# Altium PCB ZMBo 1.1.PcbDoc (part 1 of 4)
Units mil, origin at the board's own origin, x right, y up, seen from the top; angles counter-clockwise.
Board outline 6000 x 4000 mil, 4 copper layers (Top Layer, Groun Plane, Power Plane, Bottom Layer); 280 components, 251 nets, 1047 pads, 1788 vias.
Unrouted connection lines stored in the file: 231.
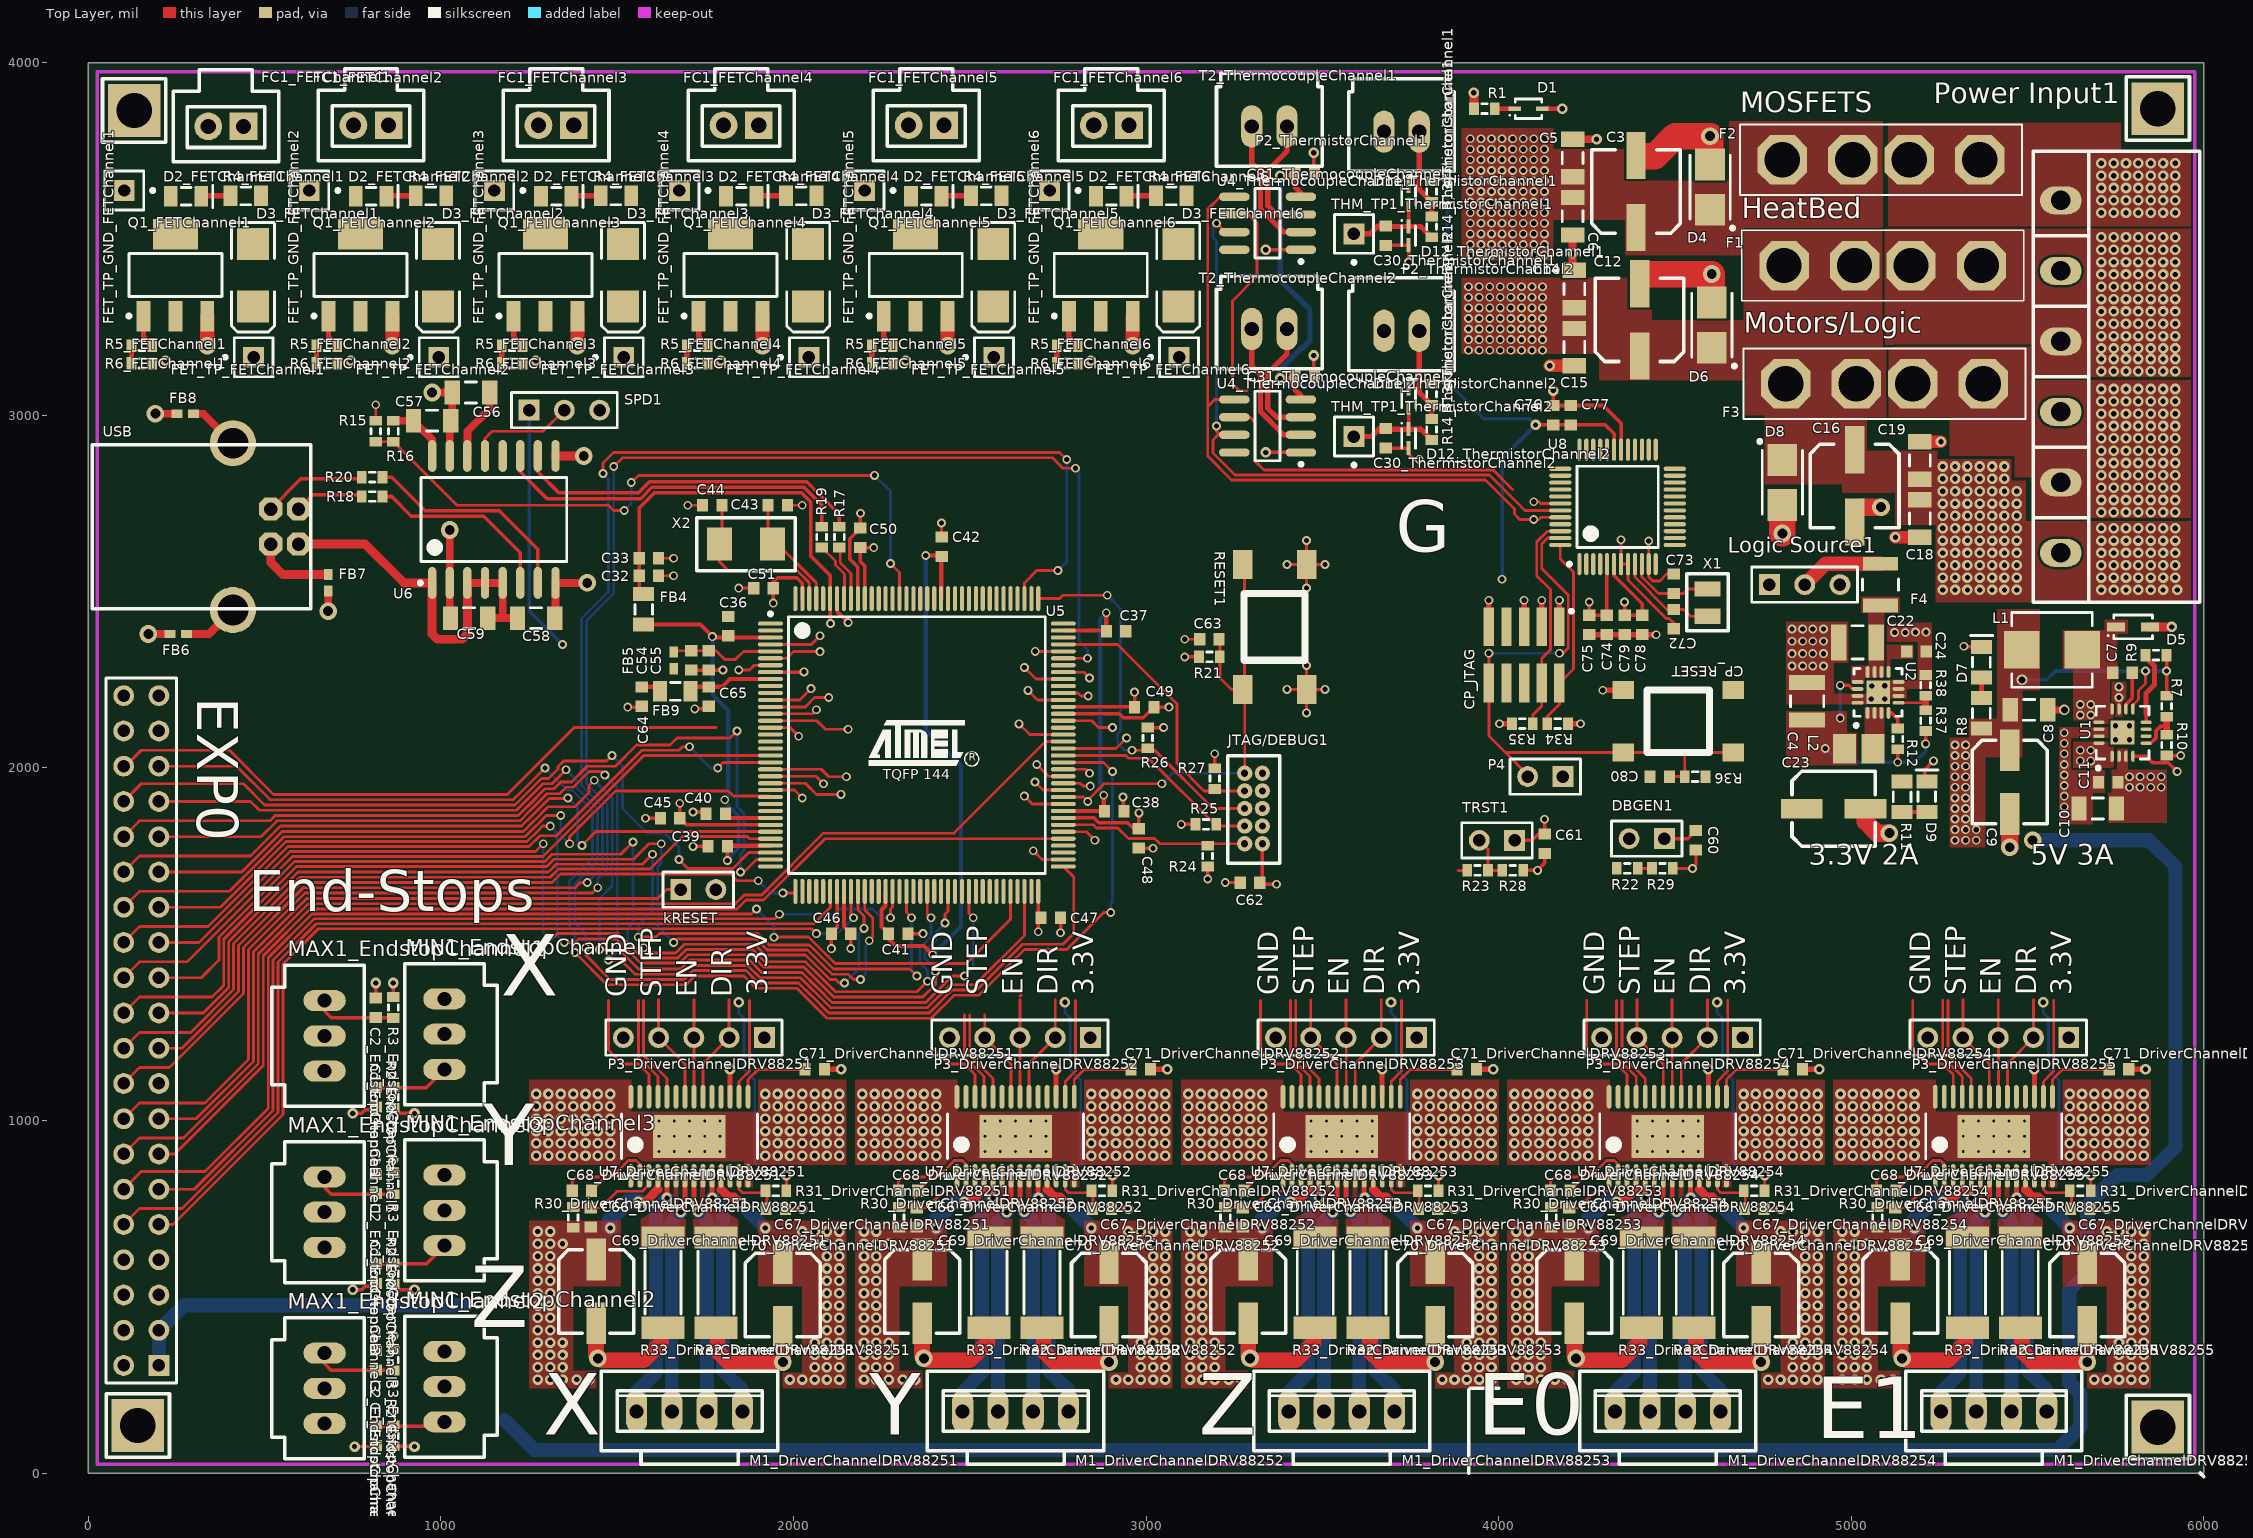
[diagram p0: Top Layer view]
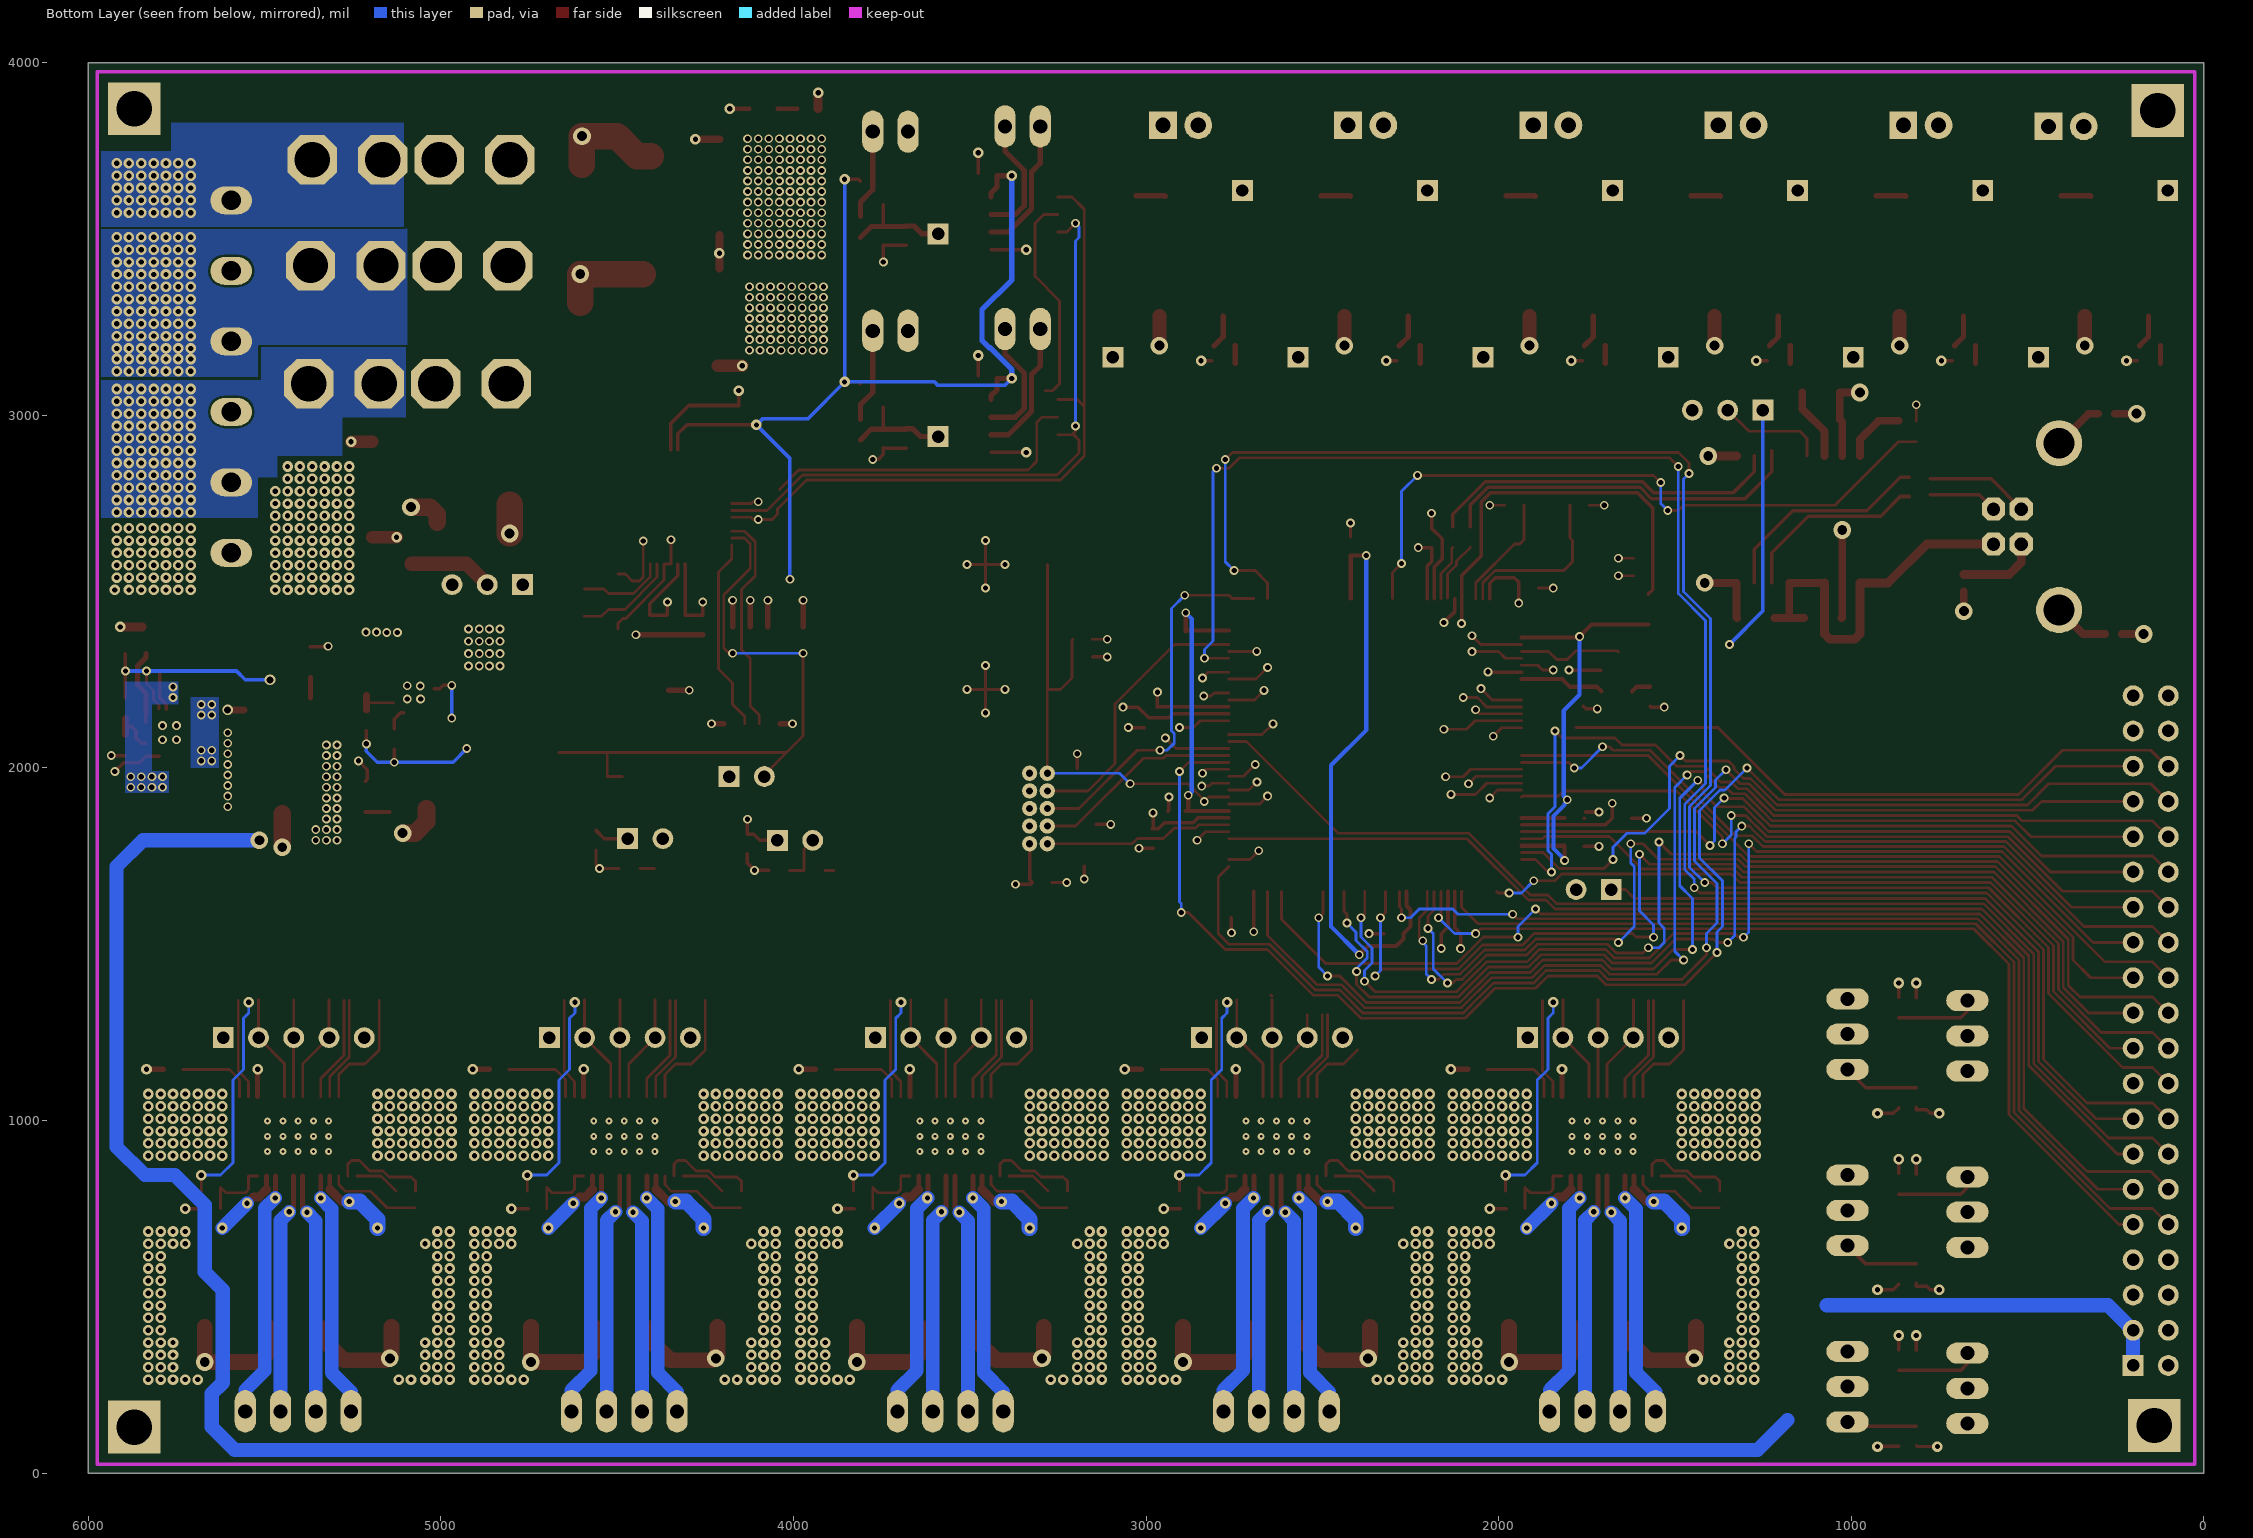
[diagram p1: Bottom Layer view, seen from below]
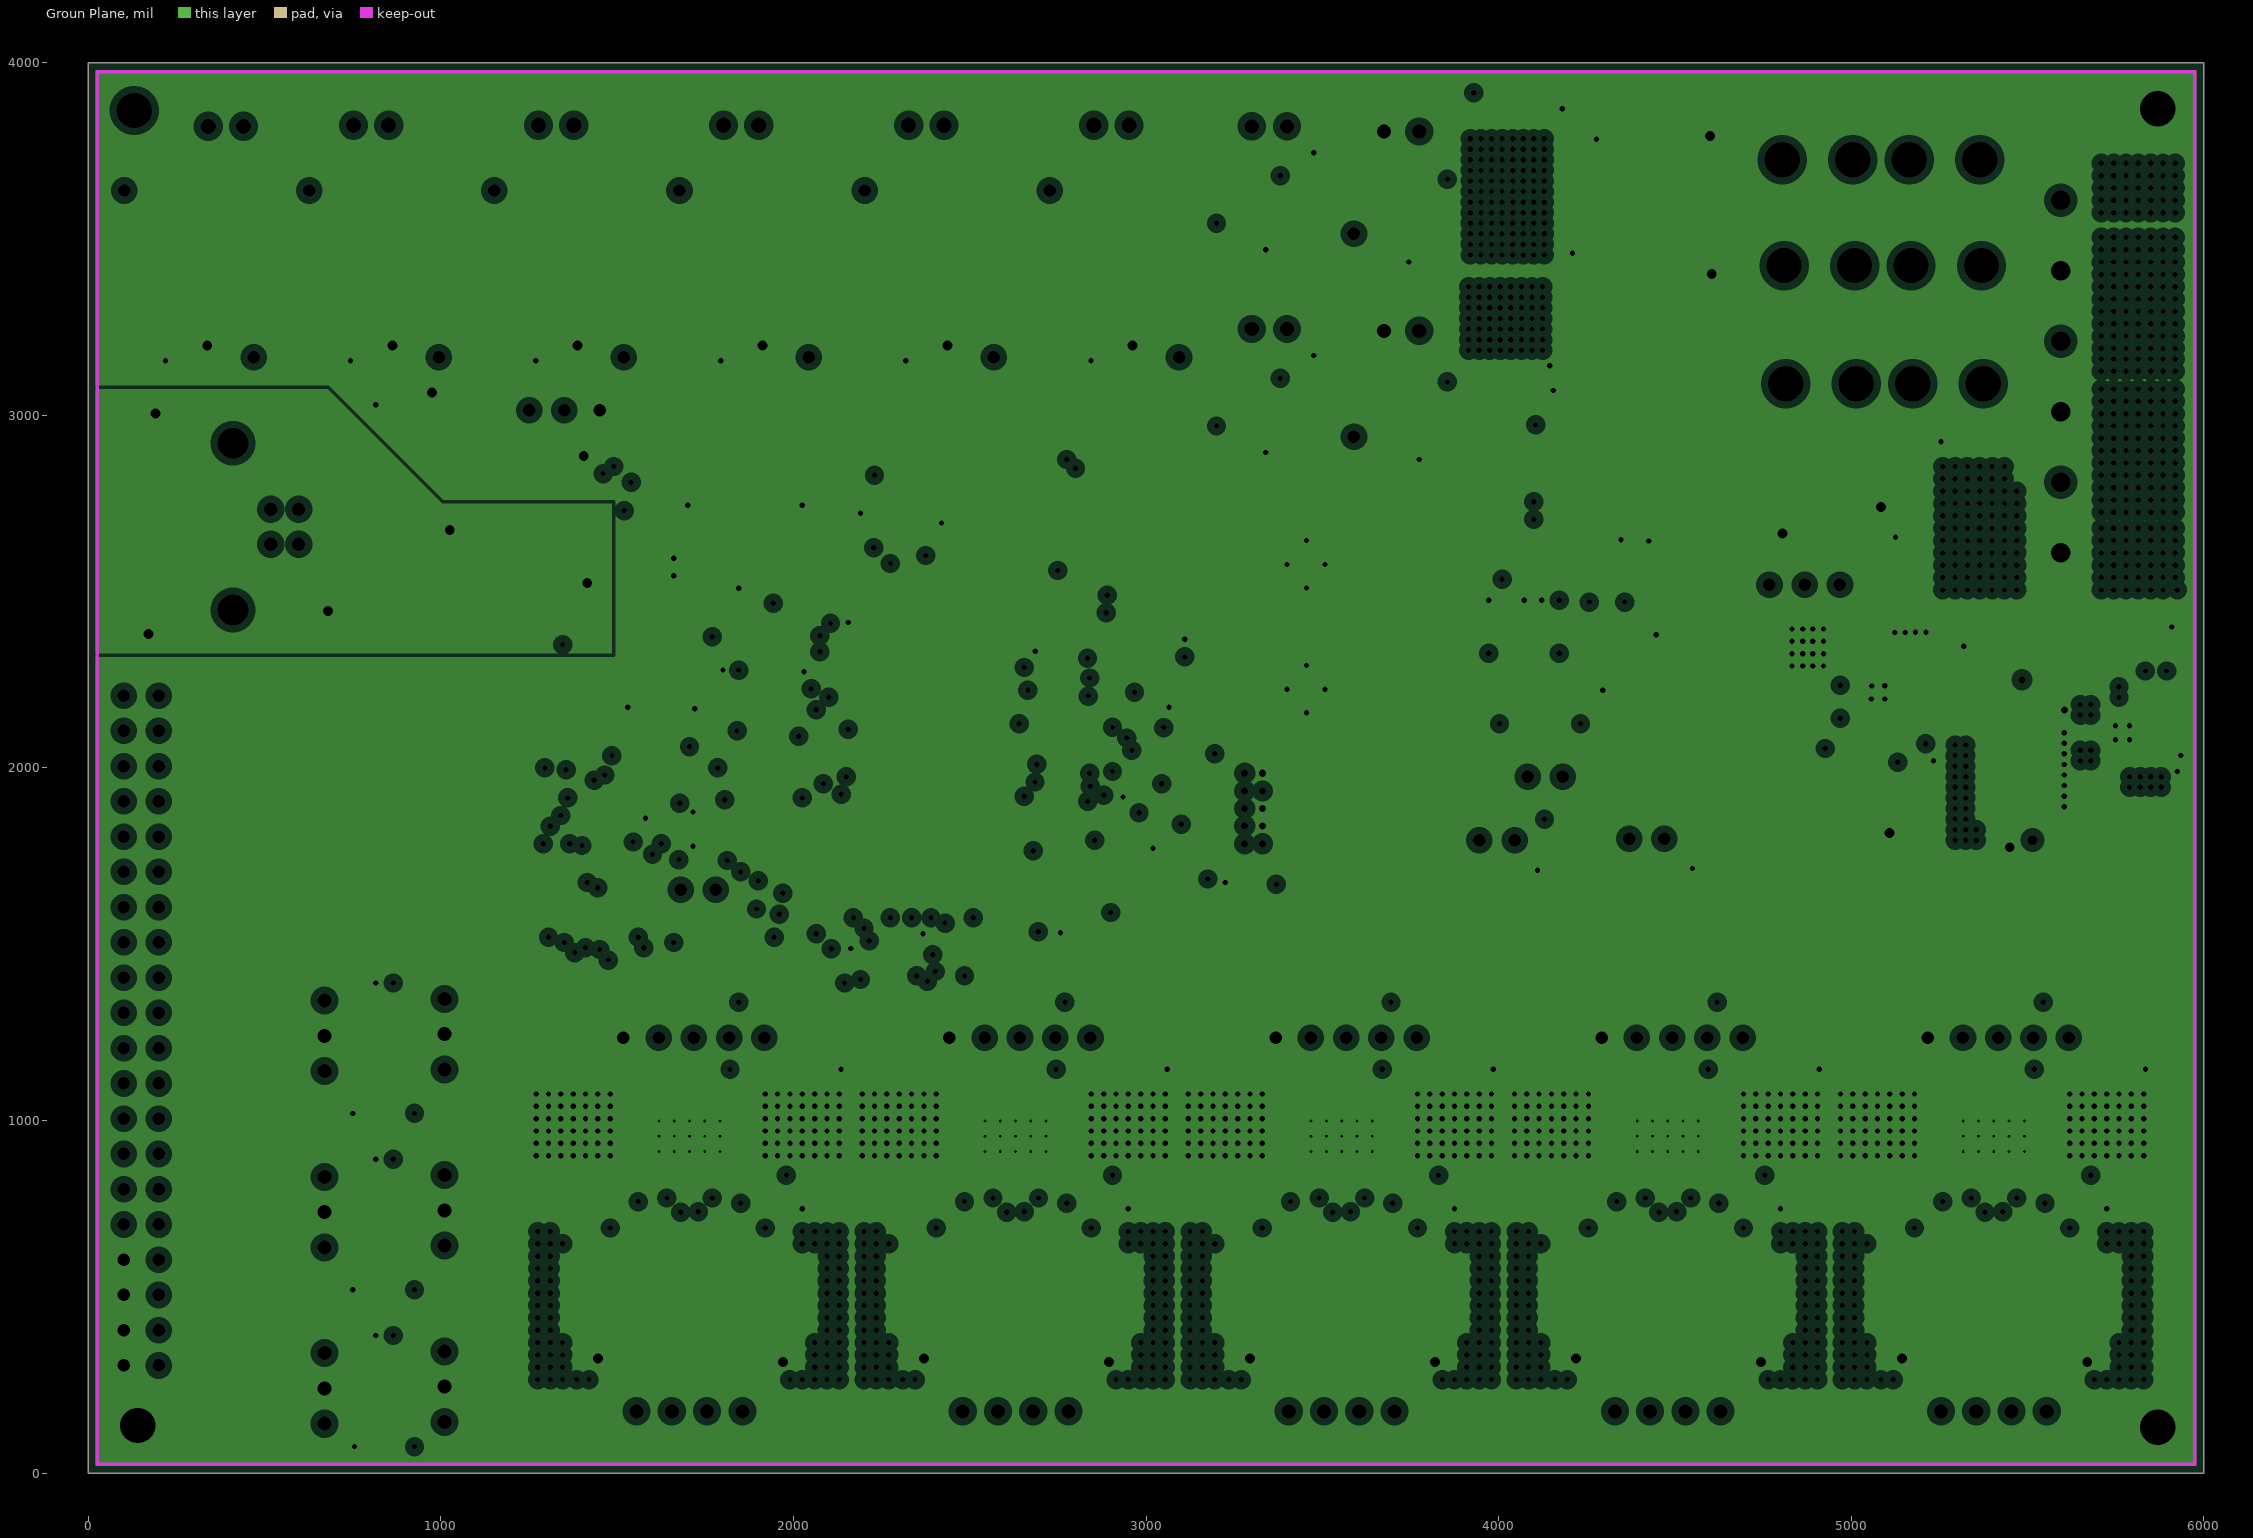
[diagram p2: Groun Plane, clearances drawn from the general rule]
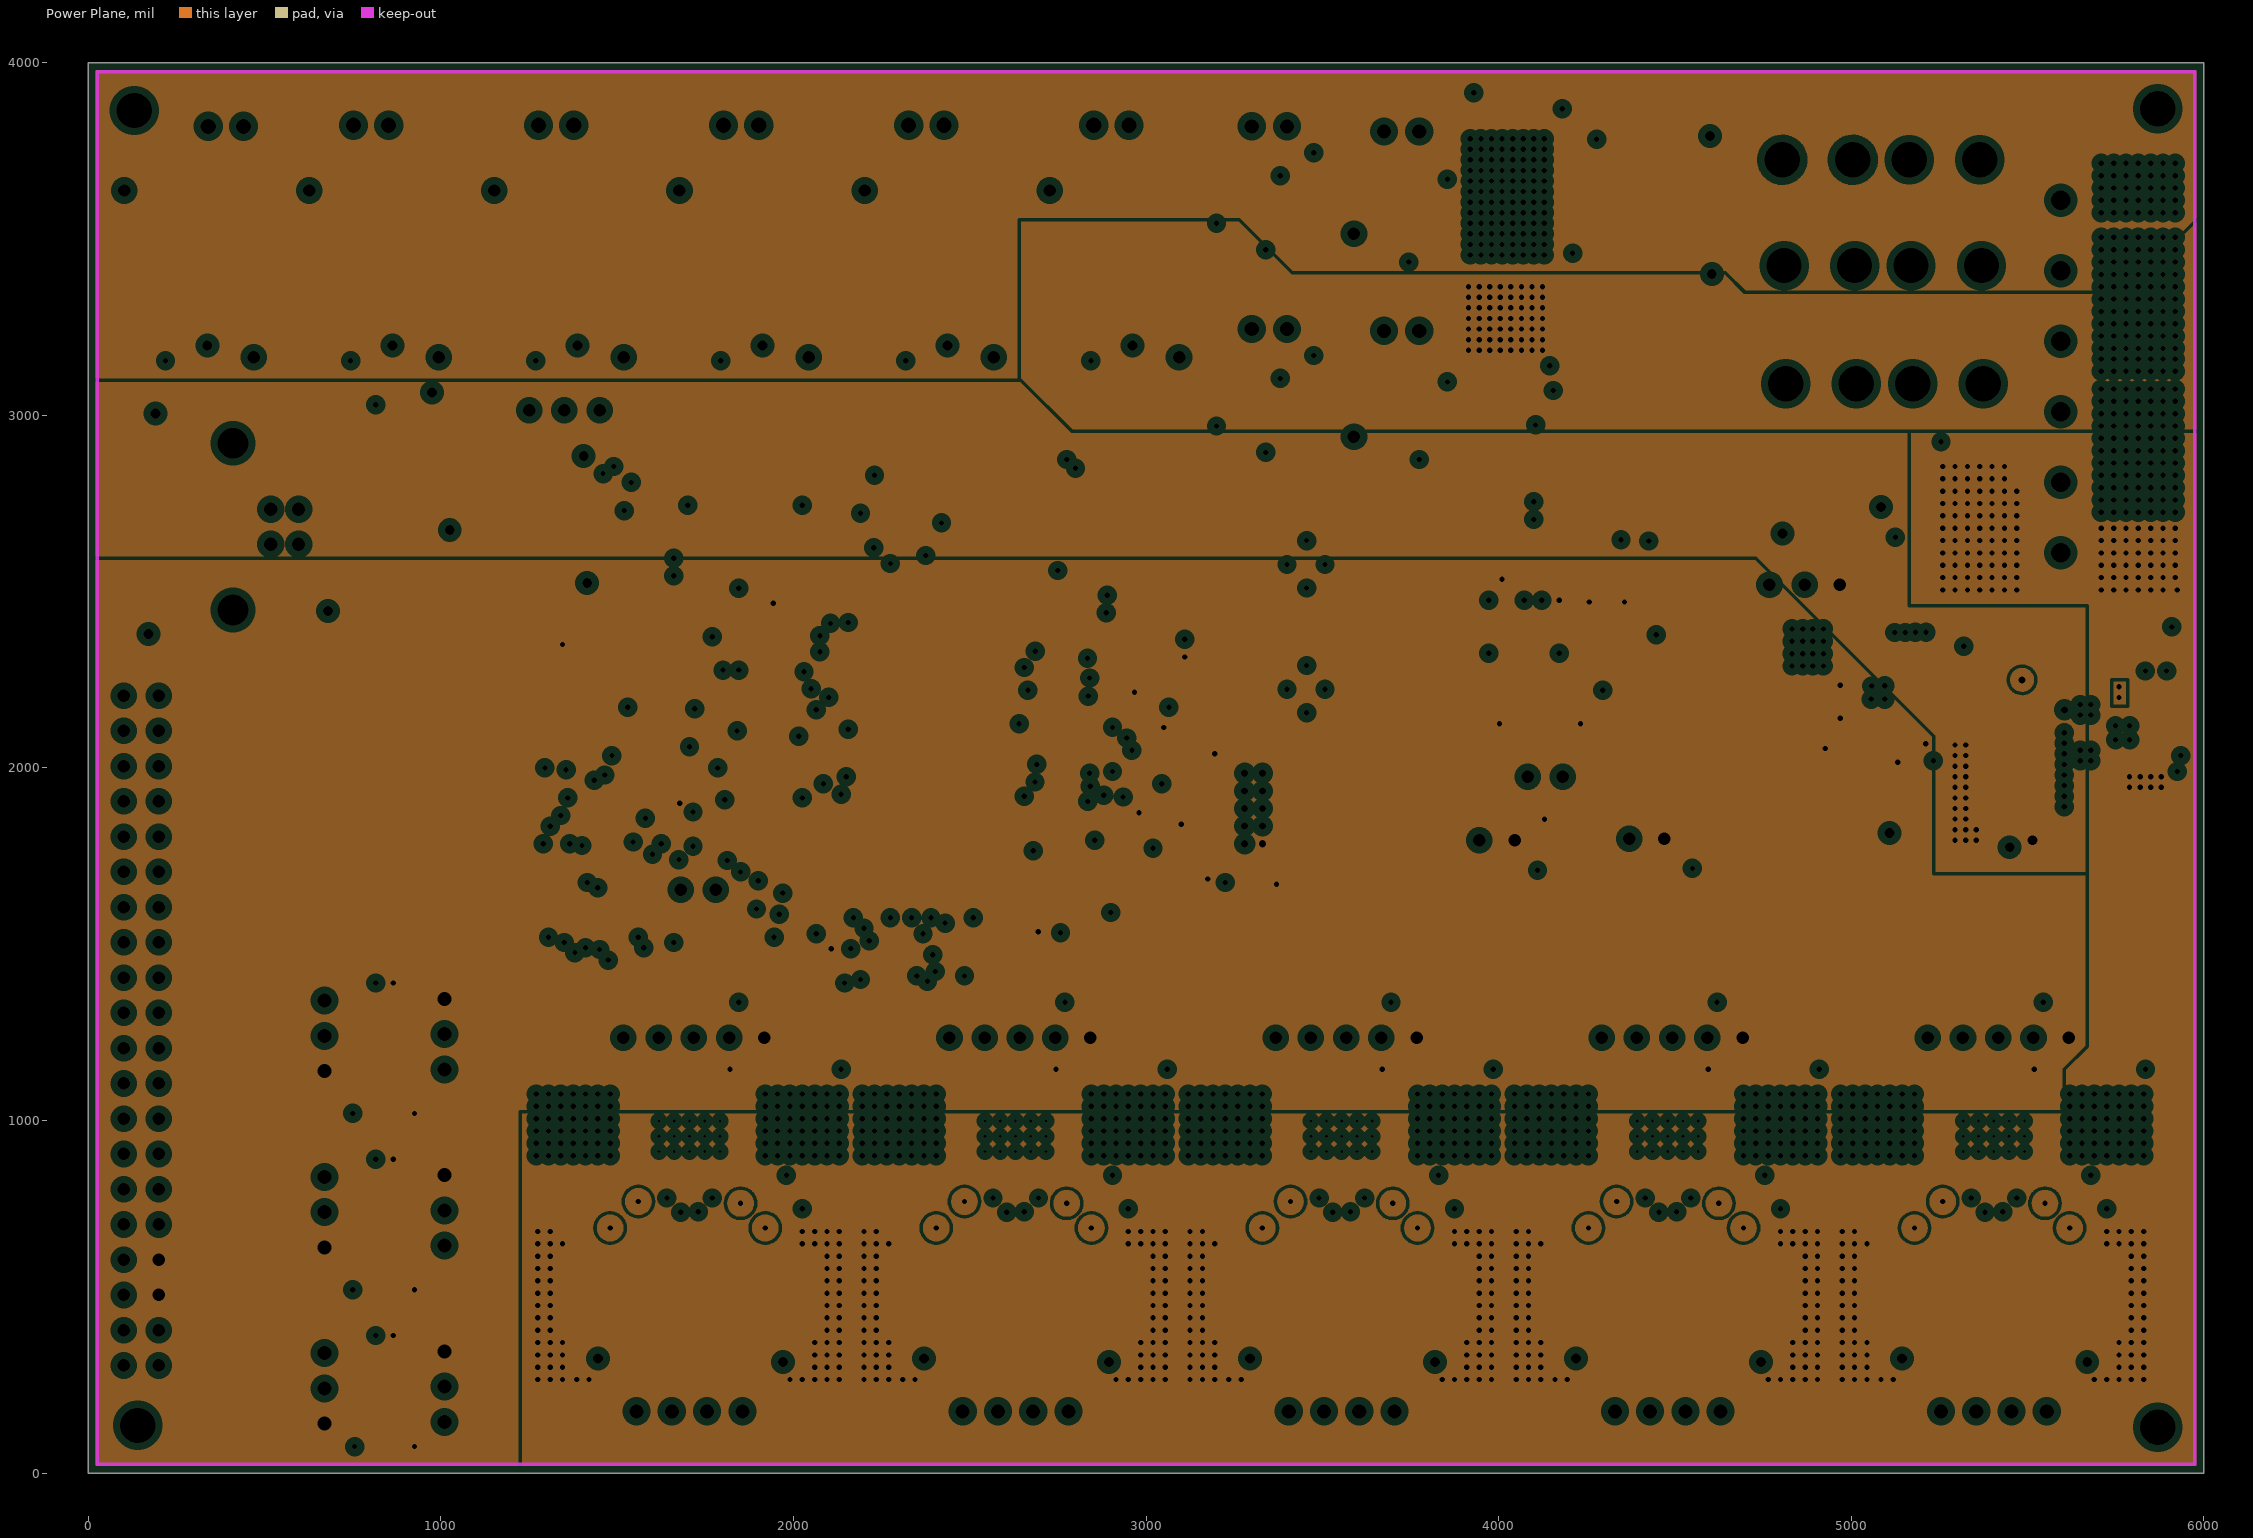
[diagram p3: Power Plane, clearances drawn from the general rule]

## Layer stack, top to bottom
Top Layer: signal copper 1.4
Dielectric: core 12.6, FR-4, Dk 4.8
Groun Plane: plane copper 1.4, net (Multiple Nets)
Dielectric: prepreg 12.6, FR-4, Dk 4.8
Power Plane: plane copper 1.4, net (Multiple Nets)
Dielectric: core 12.6, FR-4, Dk 4.8
Bottom Layer: signal copper 1.4

## Board outline
0,0 6000,0 6000,4000 0,4000

## Design rules (kind name [scope] priority, off if disabled: settings)
Clearance [All] p1: gap=6
ComponentClearance [All] p1: gap=0 collisioncheckmode=3 verticalgap=10 showdistances=FALSE
FanoutControl Fanout_SOIC [(InComponent('U8') AND InComponent('U7'))] p3: bgadir=Out bgaviamode=Centered fanoutstyle=Staggered fanoutdirection=Alternating viagrid=1 // Fanout_SOIC (Default Rule)
FanoutControl Fanout_Small [All] p4: bgadir=Out bgaviamode=Centered fanoutstyle=Auto fanoutdirection=Alternating viagrid=1 // Fanout_Small (Default Rule)
HoleSize [All] p1: absolutevalues=TRUE maxlimit=120 minlimit=1 maxpercent=80.000 minpercent=20.000
MinimumSolderMaskSliver [All] p1 off: minsoldermaskwidth=10
PlaneClearance [All] p1: clearance=20
PlaneConnect [All] p1: planeconnectstyle=Direct reliefexpansion=20 reliefentries=4 reliefconductorwidth=10 reliefairgap=10
PolygonConnect [All] p1: connectstyle=Direct reliefconductorwidth=45 reliefentries=4 polygonreliefangle="90 Angle" airgapwidth=10
RoomDefinition "U_Offboard Kinen Expansion" [InComponentClass('U_Offboard Kinen Expansion')] p1: confinementstyle=ConfineIn formatcopy=TRUE lockcomponents=FALSE outline 0,0 475,0 475,2550 0,2550
RoomDefinition U_CoProcessor [InComponentClass('U_CoProcessor')] p2: confinementstyle=ConfineIn formatcopy=TRUE lockcomponents=FALSE outline 4725,1900 4725,3100 3900,3100 3900,1900
RoomDefinition ThermocoupleChannel2 [InComponentClass('ThermocoupleChannel2')] p3: confinementstyle=ConfineIn formatcopy=TRUE lockcomponents=FALSE outline 3525,2850 3525,3425 3175,3425 3175,2850
RoomDefinition ThermocoupleChannel1 [InComponentClass('ThermocoupleChannel1')] p4: confinementstyle=ConfineIn formatcopy=TRUE lockcomponents=FALSE outline 3525,3425 3525,4000 3175,4000 3175,3425
RoomDefinition ThermistorChannel2 [InComponentClass('ThermistorChannel2')] p5: confinementstyle=ConfineIn formatcopy=TRUE lockcomponents=FALSE outline 3525,2825 3900,2825 3900,3400 3525,3400
RoomDefinition ThermistorChannel1 [InComponentClass('ThermistorChannel1')] p6: confinementstyle=ConfineIn formatcopy=TRUE lockcomponents=FALSE outline 3525,3400 3900,3400 3900,3975 3525,3975
RoomDefinition FETChannel6 [InComponentClass('FETChannel6')] p7: confinementstyle=ConfineIn formatcopy=TRUE lockcomponents=TRUE outline 2650,3100 3175,3100 3175,3998 2650,3998
RoomDefinition FETChannel5 [InComponentClass('FETChannel5')] p8: confinementstyle=ConfineIn formatcopy=TRUE lockcomponents=TRUE outline 2125,3100 2650,3100 2650,3998 2125,3998
RoomDefinition FETChannel4 [InComponentClass('FETChannel4')] p9: confinementstyle=ConfineIn formatcopy=TRUE lockcomponents=TRUE outline 1600,3100 2125,3100 2125,3998 1600,3998
RoomDefinition FETChannel3 [InComponentClass('FETChannel3')] p10: confinementstyle=ConfineIn formatcopy=TRUE lockcomponents=TRUE outline 1075,3100 1600,3100 1600,3998 1075,3998
RoomDefinition FETChannel2 [InComponentClass('FETChannel2')] p11: confinementstyle=ConfineIn formatcopy=TRUE lockcomponents=TRUE outline 550,3100 1075,3100 1075,3998 550,3998
RoomDefinition FETChannel1 [InComponentClass('FETChannel1')] p12: confinementstyle=ConfineIn formatcopy=TRUE lockcomponents=FALSE outline 25,3100 550,3100 550,3998 25,3998
RoomDefinition EndstopChannel3 [InComponentClass('EndstopChannel3')] p13: confinementstyle=ConfineIn formatcopy=TRUE lockcomponents=TRUE outline 475,500 1200,500 1200,1000 475,1000
RoomDefinition EndstopChannel2 [InComponentClass('EndstopChannel2')] p14: confinementstyle=ConfineIn formatcopy=TRUE lockcomponents=FALSE outline 475,0 1200,0 1200,500 475,500
RoomDefinition EndstopChannel1 [InComponentClass('EndstopChannel1')] p15: confinementstyle=ConfineIn formatcopy=TRUE lockcomponents=FALSE outline 475,1000 1200,1000 1200,1500 475,1500
RoomDefinition DriverChannelDRV88255 [InComponentClass('DriverChannelDRV88255')] p16: confinementstyle=ConfineIn formatcopy=TRUE lockcomponents=TRUE outline 4950,0 5875,0 5875,1350 4950,1350
RoomDefinition DriverChannelDRV88254 [InComponentClass('DriverChannelDRV88254')] p17: confinementstyle=ConfineIn formatcopy=TRUE lockcomponents=TRUE outline 4025,0 4950,0 4950,1350 4025,1350
RoomDefinition DriverChannelDRV88253 [InComponentClass('DriverChannelDRV88253')] p18: confinementstyle=ConfineIn formatcopy=TRUE lockcomponents=TRUE outline 3100,0 4025,0 4025,1350 3100,1350
RoomDefinition DriverChannelDRV88252 [InComponentClass('DriverChannelDRV88252')] p19: confinementstyle=ConfineIn formatcopy=TRUE lockcomponents=TRUE outline 2175,0 3100,0 3100,1350 2175,1350
RoomDefinition DriverChannelDRV88251 [InComponentClass('DriverChannelDRV88251')] p20: confinementstyle=ConfineIn formatcopy=TRUE lockcomponents=FALSE outline 1250,0 2175,0 2175,1350 1250,1350
RoutingVias [All] p1: holewidth=15 width=25 viastyle="Through Hole" minholewidth=15 minwidth=25 maxholewidth=28 maxwidth=50
SilkToSilkClearance [All] p1 off: silktosilkclearance=10
SilkToSolderMaskClearance SilkscreenOverComponentPads [IsPad] p1 off: minsilkscreentomaskgap=10 clearancetoexposedcopper=TRUE
SolderMaskExpansion [All] p1: expansion=4
Width [All] p1: maxlimit=200 minlimit=6 preferedwidth=6 minimp=50.000000 maximp=50.000000 favimp=50.000000
19 further rules are at their usual default settings.

## Classes and differential pairs
component class FETChannel6: D2_FETChannel6 D3_FETChannel6 FC1_FETChannel6 FET_TP_FETChannel6 FET_TP_GND_FETChannel6 Q1_FETChannel6 R4_FETChannel6 R5_FETChannel6 R6_FETChannel6
net class MISO[1..2]: MISO0 MISO1 MISO2
net class SCLK[1..2]: SCLK0 SCLK1 SCLK2
net class VCC_SOURCE[1..6]: VCC_SOURCE1 VCC_SOURCE2 VCC_SOURCE3 VCC_SOURCE4 VCC_SOURCE5 VCC_SOURCE6
net class THERM_AN[1..2]: THERM_AN0 THERM_AN1 THERM_AN2
net class TC_CS[1..2]: TC_CS0 TC_CS1 TC_CS2
net class STEP[1..5]: STEP1 STEP2 STEP3 STEP4 STEP5
net class REF[1..5]: REF1 REF2 REF3 REF4 REF5
net class MOD2E[1..5]: MOD2E1 MOD2E2 MOD2E3 MOD2E4 MOD2E5
net class MOD1E[1..5]: MOD1E1 MOD1E2 MOD1E3 MOD1E4 MOD1E5
net class MOD0E[1..5]: MOD0E1 MOD0E2 MOD0E3 MOD0E4 MOD0E5
net class MIN_ES[1..3]: MIN_ES0 MIN_ES1 MIN_ES2 MIN_ES3
net class MAX_ES[1..3]: MAX_ES0 MAX_ES1 MAX_ES2 MAX_ES3
net class FET_PWM[1..6]: FET_PWM1 FET_PWM2 FET_PWM3 FET_PWM5
net class EN[1..5]: EN1 EN2 EN3 EN4 EN5
net class DRV_RESET[1..5]: DRV_RESET1 DRV_RESET2 DRV_RESET3 DRV_RESET4 DRV_RESET5
net class DIR[1..5]: DIR1 DIR2 DIR3 DIR4 DIR5
component class "U_Offboard Kinen Expansion": EXP0
component class U_CoProcessor: C72 C73 C74 C75 C76 C77 C78 C79 C80 CP_JTAG CP_RESET P4 R34 R35 R36 U8 X1
component class Designator: C3 C4 C5 C6 C7 C8 C9 C10 C11 C12 C14 C15 C16 C18 C19 C22 C23 C24 D4 D5 D6 D7 D8 D9 F1 F2 F3 F4 L1 L2 "Logic Source1" "Power Input1" R7 R8 R9 R10 R11 R12 R37 R38 U1 U2
component class "ATSAM4E16EA_AU Main Controller": C32 C33 C36 C37 C38 C39 C40 C41 C42 C43 C44 C45 C46 C47 C48 C49 C50 C51 C54 C55 C56 C57 C58 C59 C60 C61 C62 C63 C64 C65 D1 DBGEN1 FB4 FB5 FB6 FB7 FB8 FB9 JTAG/DEBUG1 kRESET R1 R15 R16 R17 R18 R19 R20 R21 R22 R23 R24 R25 R26 R27 R28 R29 RESET1 SPD1 TRST1 U5 U6 USB X2
component class DriverChannelDRV88251: C66_DriverChannelDRV88251 C67_DriverChannelDRV88251 C68_DriverChannelDRV88251 C69_DriverChannelDRV88251 C70_DriverChannelDRV88251 C71_DriverChannelDRV88251 M1_DriverChannelDRV88251 P3_DriverChannelDRV88251 R30_DriverChannelDRV88251 R31_DriverChannelDRV88251 R32_DriverChannelDRV88251 R33_DriverChannelDRV88251 U7_DriverChannelDRV88251
component class DriverChannelDRV88252: C66_DriverChannelDRV88252 C67_DriverChannelDRV88252 C68_DriverChannelDRV88252 C69_DriverChannelDRV88252 C70_DriverChannelDRV88252 C71_DriverChannelDRV88252 M1_DriverChannelDRV88252 P3_DriverChannelDRV88252 R30_DriverChannelDRV88252 R31_DriverChannelDRV88252 R32_DriverChannelDRV88252 R33_DriverChannelDRV88252 U7_DriverChannelDRV88252
component class DriverChannelDRV88253: C66_DriverChannelDRV88253 C67_DriverChannelDRV88253 C68_DriverChannelDRV88253 C69_DriverChannelDRV88253 C70_DriverChannelDRV88253 C71_DriverChannelDRV88253 M1_DriverChannelDRV88253 P3_DriverChannelDRV88253 R30_DriverChannelDRV88253 R31_DriverChannelDRV88253 R32_DriverChannelDRV88253 R33_DriverChannelDRV88253 U7_DriverChannelDRV88253
component class DriverChannelDRV88254: C66_DriverChannelDRV88254 C67_DriverChannelDRV88254 C68_DriverChannelDRV88254 C69_DriverChannelDRV88254 C70_DriverChannelDRV88254 C71_DriverChannelDRV88254 M1_DriverChannelDRV88254 P3_DriverChannelDRV88254 R30_DriverChannelDRV88254 R31_DriverChannelDRV88254 R32_DriverChannelDRV88254 R33_DriverChannelDRV88254 U7_DriverChannelDRV88254
component class DriverChannelDRV88255: C66_DriverChannelDRV88255 C67_DriverChannelDRV88255 C68_DriverChannelDRV88255 C69_DriverChannelDRV88255 C70_DriverChannelDRV88255 C71_DriverChannelDRV88255 M1_DriverChannelDRV88255 P3_DriverChannelDRV88255 R30_DriverChannelDRV88255 R31_DriverChannelDRV88255 R32_DriverChannelDRV88255 R33_DriverChannelDRV88255 U7_DriverChannelDRV88255
component class EndstopChannel1: C1_EndstopChannel1 C2_EndstopChannel1 MAX1_EndstopChannel1 MIN1_EndstopChannel1 R2_EndstopChannel1 R3_EndstopChannel1
component class EndstopChannel2: C1_EndstopChannel2 C2_EndstopChannel2 MAX1_EndstopChannel2 MIN1_EndstopChannel2 R2_EndstopChannel2 R3_EndstopChannel2
component class EndstopChannel3: C1_EndstopChannel3 C2_EndstopChannel3 MAX1_EndstopChannel3 MIN1_EndstopChannel3 R2_EndstopChannel3 R3_EndstopChannel3
component class FETChannel1: D2_FETChannel1 D3_FETChannel1 FC1_FETChannel1 FET_TP_FETChannel1 FET_TP_GND_FETChannel1 Q1_FETChannel1 R4_FETChannel1 R5_FETChannel1 R6_FETChannel1
component class FETChannel2: D2_FETChannel2 D3_FETChannel2 FC1_FETChannel2 FET_TP_FETChannel2 FET_TP_GND_FETChannel2 Q1_FETChannel2 R4_FETChannel2 R5_FETChannel2 R6_FETChannel2
component class FETChannel3: D2_FETChannel3 D3_FETChannel3 FC1_FETChannel3 FET_TP_FETChannel3 FET_TP_GND_FETChannel3 Q1_FETChannel3 R4_FETChannel3 R5_FETChannel3 R6_FETChannel3
component class FETChannel4: D2_FETChannel4 D3_FETChannel4 FC1_FETChannel4 FET_TP_FETChannel4 FET_TP_GND_FETChannel4 Q1_FETChannel4 R4_FETChannel4 R5_FETChannel4 R6_FETChannel4
component class FETChannel5: D2_FETChannel5 D3_FETChannel5 FC1_FETChannel5 FET_TP_FETChannel5 FET_TP_GND_FETChannel5 Q1_FETChannel5 R4_FETChannel5 R5_FETChannel5 R6_FETChannel5
component class ThermistorChannel1: C30_ThermistorChannel1 D11_ThermistorChannel1 D12_ThermistorChannel1 P2_ThermistorChannel1 R13_ThermistorChannel1 R14_ThermistorChannel1 THM_TP1_ThermistorChannel1
component class ThermistorChannel2: C30_ThermistorChannel2 D11_ThermistorChannel2 D12_ThermistorChannel2 P2_ThermistorChannel2 R13_ThermistorChannel2 R14_ThermistorChannel2 THM_TP1_ThermistorChannel2
component class ThermocoupleChannel1: C31_ThermocoupleChannel1 T2_ThermocoupleChannel1 U4_ThermocoupleChannel1
component class ThermocoupleChannel2: C31_ThermocoupleChannel2 T2_ThermocoupleChannel2 U4_ThermocoupleChannel2
net class OVREF[1..2]: OVREF1 OVREF2
channel class "Driver Channel DRV8825": DriverChannelDRV88251 DriverChannelDRV88252 DriverChannelDRV88253 DriverChannelDRV88254 DriverChannelDRV88255
channel class "Endstop Channel": EndstopChannel1 EndstopChannel2 EndstopChannel3
channel class "FET Channel": FETChannel1 FETChannel2 FETChannel3 FETChannel4 FETChannel5 FETChannel6
channel class "Thermistor Channel": ThermistorChannel1 ThermistorChannel2
channel class "Thermocouple Channel": ThermocoupleChannel1 ThermocoupleChannel2

## Components (designator, comment, footprint, x,y, rotation, side; value= is the part's Value field where it differs from the comment)
C1_EndstopChannel1 "0603" 1608[0603] 815,1065.47 r270 top (schematic designator C1)
C1_EndstopChannel2 "0603" 1608[0603] 815,105.47 r270 top (schematic designator C1)
C1_EndstopChannel3 "0603" 1608[0603] 815,565.47 r270 top (schematic designator C1)
C2_EndstopChannel1 "0603" 1608[0603] 815,1320 r90 top (schematic designator C2)
C2_EndstopChannel2 "0603" 1608[0603] 815,320 r90 top (schematic designator C2)
C2_EndstopChannel3 "0603" 1608[0603] 815,820 r90 top (schematic designator C2)
C3 "VAS D" "Panasonic VS D" 4390,3635 r270 top
C4 "1210" C1210 4875.58,2189.31 r90 top
C5 "1206" C1206 4210,3730 r270 top
C6 "1206" C1206 4210,3565 r90 top
C7 "Cap Semi" 1608[0603] 5770,2270 r0 top
C8 "Cap Semi" C1206 5505,2165 r180 top
C9 "VS C" "Panasonic VS C" 5565,1840 r90 top
C10 "Cap Semi" C1206 5700,1885 r0 top
C11 "Cap Semi" 1608[0603] 5730,1960 r0 top
C12 "VAS D" "Panasonic VS D" 4400,3271.02 r270 top
C14 "1206" C1206 4215,3358.66 r270 top
C15 "1206" C1206 4215,3193.66 r90 top
C16 "VAS D" "Panasonic VS D" 5010,2800 r90 top
C18 "1206" C1206 5195,2707.36 r90 top
C19 "1206" C1206 5195,2872.36 r270 top
C22 "1210" C1210 5018.58,2356.31 r180 top
C23 "VS C" "Panasonic VS C" 5070.58,1999.31 r180 top
C24 "0603" 1608[0603] 5185.58,2330.31 r180 top
C30_ThermistorChannel1 "Cap Semi" 1608[0603] 3680,3510 r90 top (schematic designator C30)
C30_ThermistorChannel2 "Cap Semi" 1608[0603] 3680,2935 r90 top (schematic designator C30)
C31_ThermocoupleChannel1 "Cap Semi" 1608[0603] 3450.51,3685 r180 top (schematic designator C31)
C31_ThermocoupleChannel2 "Cap Semi" 1608[0603] 3450.51,3110 r180 top (schematic designator C31)
C32 "0603" 1608[0603] 1590,2545 r180 top
C33 "0603" 1608[0603] 1590,2595 r180 top
C36 "0603" 1608[0603] 1815,2402.56 r270 top
C37 "0603" 1608[0603] 2915,2387.56 r180 top
C38 "0603" 1608[0603] 2910,1877.56 r180 top
C39 "0603" 1608[0603] 1785,1777.56 r0 top
C40 "0603" 1608[0603] 1780,1870 r0 top
C41 "0603" 1608[0603] 2297.44,1530 r180 top
C42 "0603" 1608[0603] 2420,2627.56 r270 top
C43 "0603" 1608[0603] 1955,2745 r180 top
C44 "0603" 1608[0603] 1770,2745 r0 top
C45 "0603" 1608[0603] 1650,1857.56 r0 top
C46 "0603" 1608[0603] 2135,1530 r180 top
C47 "0603" 1608[0603] 2730,1575 r180 top
C48 "0603" 1608[0603] 2980,1800 r90 top
C49 "0603" 1608[0603] 2995,2172.56 r180 top
C50 "0603" 1608[0603] 2190,2652.56 r270 top
C51 "0603" 1608[0603] 1915,2510 r0 top
C54 "0603" 1608[0603] 1710,2305 r90 top
C55 "0603" 1608[0603] 1760,2305 r90 top
C56 "1206" C1206 1085,3065 r0 top
C57 "1206" C1206 975,2985 r180 top
C58 "1206" C1206 1270,2425 r180 top
C59 "1206" C1206 1080,2425 r0 top
C60 "Cap Semi" 1608[0603] 4560,1795 r90 top
C61 "Cap Semi" 1608[0603] 4130.47,1784.53 r90 top
C62 "Cap Semi" 1608[0603] 3295,1675 r0 top
C63 "Cap Semi" 1608[0603] 3180,2365 r0 top
C64 "0603" 1608[0603] 1570,2202.56 r90 top
C65 "0603" 1608[0603] 1760,2202.56 r90 top
C66_DriverChannelDRV88251 "0603" 1608[0603] 1425,725 r90 top (schematic designator C66)
C66_DriverChannelDRV88252 "0603" 1608[0603] 2350,725 r90 top (schematic designator C66)
C66_DriverChannelDRV88253 "0603" 1608[0603] 3275,725 r90 top (schematic designator C66)
C66_DriverChannelDRV88254 "0603" 1608[0603] 4200,725 r90 top (schematic designator C66)
C66_DriverChannelDRV88255 "0603" 1608[0603] 5125,725 r90 top (schematic designator C66)
C67_DriverChannelDRV88251 "0603" 1608[0603] 1950,750 r180 top (schematic designator C67)
C67_DriverChannelDRV88252 "0603" 1608[0603] 2875,750 r180 top (schematic designator C67)
C67_DriverChannelDRV88253 "0603" 1608[0603] 3800,750 r180 top (schematic designator C67)
C67_DriverChannelDRV88254 "0603" 1608[0603] 4725,750 r180 top (schematic designator C67)
C67_DriverChannelDRV88255 "0603" 1608[0603] 5650,750 r180 top (schematic designator C67)
C68_DriverChannelDRV88251 "0603" 1608[0603] 1400,800 r180 top (schematic designator C68)
C68_DriverChannelDRV88252 "0603" 1608[0603] 2325,800 r180 top (schematic designator C68)
C68_DriverChannelDRV88253 "0603" 1608[0603] 3250,800 r180 top (schematic designator C68)
C68_DriverChannelDRV88254 "0603" 1608[0603] 4175,800 r180 top (schematic designator C68)
C68_DriverChannelDRV88255 "0603" 1608[0603] 5100,800 r180 top (schematic designator C68)
C69_DriverChannelDRV88251 "VS C" "Panasonic VS C" 1555,395 r90 top (schematic designator C69)
C69_DriverChannelDRV88252 "VS C" "Panasonic VS C" 2480,395 r90 top (schematic designator C69)
C69_DriverChannelDRV88253 "VS C" "Panasonic VS C" 3405,395 r90 top (schematic designator C69)
C69_DriverChannelDRV88254 "VS C" "Panasonic VS C" 4330,395 r90 top (schematic designator C69)
C69_DriverChannelDRV88255 "VS C" "Panasonic VS C" 5255,395 r90 top (schematic designator C69)
C70_DriverChannelDRV88251 "VS C" "Panasonic VS C" 2085,385 r90 top (schematic designator C70)
C70_DriverChannelDRV88252 "VS C" "Panasonic VS C" 3010,385 r90 top (schematic designator C70)
C70_DriverChannelDRV88253 "VS C" "Panasonic VS C" 3935,385 r90 top (schematic designator C70)
C70_DriverChannelDRV88254 "VS C" "Panasonic VS C" 4860,385 r90 top (schematic designator C70)
C70_DriverChannelDRV88255 "VS C" "Panasonic VS C" 5785,385 r90 top (schematic designator C70)
C71_DriverChannelDRV88251 "0603" 1608[0603] 2060,1145 r180 top (schematic designator C71)
C71_DriverChannelDRV88252 "0603" 1608[0603] 2985,1145 r180 top (schematic designator C71)
C71_DriverChannelDRV88253 "0603" 1608[0603] 3910,1145 r180 top (schematic designator C71)
C71_DriverChannelDRV88254 "0603" 1608[0603] 4835,1145 r180 top (schematic designator C71)
C71_DriverChannelDRV88255 "0603" 1608[0603] 5760,1145 r180 top (schematic designator C71)
C72 "0603" 1608[0603] 4497.6,2422.32 r270 top
C73 "0603" 1608[0603] 4497.6,2522.32 r90 top
C74 "0603" 1608[0603] 4307.6,2405.55 r90 top
C75 "0603" 1608[0603] 4257.6,2405.55 r90 top
C76 "0603" 1608[0603] 4155.04,3000.55 r270 top
C77 "0603" 1608[0603] 4205.04,3000.55 r270 top
C78 "0603" 1608[0603] 4407.6,2405.55 r270 top
C79 "0603" 1608[0603] 4357.6,2405.55 r270 top
C80 "0603" 1608[0603] 4457.6,1975.55 r180 top
CP_JTAG "ARM Cortex JTAG-DEBUG" FTSH-105-XX-X-DV 4072.6,2320.47 r0 top
CP_RESET "Tactile Switch" "Mountain Switch TS6324T1607" 4637.6,2220.55 r270 top
D1 "SZMM3Z4V7T1G" SZMM3Z4V7T1G 4085,3870 r180 top
D2_FETChannel1 "LED1" "SM 0805 polarized" 356.69,3578 r180 top (schematic designator D2)
D2_FETChannel2 "LED1" "SM 0805 polarized" 881.69,3578 r180 top (schematic designator D2)
D2_FETChannel3 "LED1" "SM 0805 polarized" 1406.69,3578 r180 top (schematic designator D2)
D2_FETChannel4 "LED1" "SM 0805 polarized" 1931.69,3578 r180 top (schematic designator D2)
D2_FETChannel5 "LED1" "SM 0805 polarized" 2456.69,3578 r180 top (schematic designator D2)
D2_FETChannel6 "LED1" "SM 0805 polarized" 2981.69,3578 r180 top (schematic designator D2)
D3_FETChannel1 "B240A-13-F" SMB 466.69,3398 r270 top (schematic designator D3)
D3_FETChannel2 "B240A-13-F" SMB 991.69,3398 r270 top (schematic designator D3)
D3_FETChannel3 "B240A-13-F" SMB 1516.69,3398 r270 top (schematic designator D3)
D3_FETChannel4 "B240A-13-F" SMB 2041.69,3398 r270 top (schematic designator D3)
D3_FETChannel5 "B240A-13-F" SMB 2566.69,3398 r270 top (schematic designator D3)
D3_FETChannel6 "B240A-13-F" SMB 3091.69,3398 r270 top (schematic designator D3)
D4 "SK310A-TP" SK310A-TP 4600,3647.36 r270 top
D5 "PMEG1030EH_EJ" PMEG1030EH_EJ 5800,2400 r180 top
D6 "SK310A-TP" SK310A-TP 4605,3256.02 r270 top
D7 "LED2" "SM 0805 polarized" 5413.5,2380 r270 top
D8 "SK310A-TP" SK310A-TP 4805,2810 r90 top
D9 "LED2" "SM 0805 polarized" 5258.58,1998.31 r270 top
D11_ThermistorChannel1 "Diode 1N4148" 1N4148WT 3745,3624.53 r90 top (schematic designator D11)
D11_ThermistorChannel2 "Diode 1N4148" 1N4148WT 3745,3049.53 r90 top (schematic designator D11)
D12_ThermistorChannel1 "Diode 1N4148" 1N4148WT 3745,3509.53 r90 top (schematic designator D12)
D12_ThermistorChannel2 "Diode 1N4148" 1N4148WT 3745,2934.53 r90 top (schematic designator D12)
DBGEN1 "Header 2" HDR1X2 4470.39,1799.45 r180 top
EXP0 "Header 20X2" HDR2X20 200,305 r90 top locked
F1 "3522-2" 3522-2 5090,3425 r180 top
F2 "3522-2" 3522-2 5085,3725 r180 top
F3 "3522-2" 3522-2 5095,3090 r180 top
F4 "LittleFuse F1210" F1210_M 5083.58,2520.04 r90 top
FB4 "MH2029-300Y" "SM 0805 - gap trimmed" 1575,2450 r90 top
FB5 "BLM15HG601SN1D" BLM18PG121SN1D 1660,2305 r90 top
FB6 "BLM15HG601SN1D" BLM18PG121SN1D 255,2380 r0 top
FB7 "BLM15HG601SN1D" BLM18PG121SN1D 680,2525 r90 top
FB8 "BLM15HG601SN1D" BLM18PG121SN1D 275,3005 r0 top
FB9 "MH2029-300Y" "SM 0805 - gap trimmed" 1665,2217.56 r0 top
FC1_FETChannel1 "Molex 70543-02" "Molex 70543-02" 440,3820 r180 top (schematic designator FC1)
FC1_FETChannel2 "Molex 70543-02" "Molex 70543-02" 851.69,3823 r180 top (schematic designator FC1)
FC1_FETChannel3 "Molex 70543-02" "Molex 70543-02" 1376.69,3823 r180 top (schematic designator FC1)
FC1_FETChannel4 "Molex 70543-02" "Molex 70543-02" 1901.69,3823 r180 top (schematic designator FC1)
FC1_FETChannel5 "Molex 70543-02" "Molex 70543-02" 2426.69,3823 r180 top (schematic designator FC1)
FC1_FETChannel6 "Molex 70543-02" "Molex 70543-02" 2951.69,3823 r180 top (schematic designator FC1)
FET_TP_FETChannel1 "Socket" PIN1 468.69,3165 r90 top (schematic designator FET_TP)
FET_TP_FETChannel2 "Socket" PIN1 993.69,3165 r90 top (schematic designator FET_TP)
FET_TP_FETChannel3 "Socket" PIN1 1518.69,3165 r90 top (schematic designator FET_TP)
FET_TP_FETChannel4 "Socket" PIN1 2043.69,3165 r90 top (schematic designator FET_TP)
FET_TP_FETChannel5 "Socket" PIN1 2568.69,3165 r90 top (schematic designator FET_TP)
FET_TP_FETChannel6 "Socket" PIN1 3093.69,3165 r90 top (schematic designator FET_TP)
FET_TP_GND_FETChannel1 "Socket" PIN1 101.69,3638 r270 top (schematic designator FET_TP_GND)
FET_TP_GND_FETChannel2 "Socket" PIN1 626.69,3638 r270 top (schematic designator FET_TP_GND)
FET_TP_GND_FETChannel3 "Socket" PIN1 1151.69,3638 r270 top (schematic designator FET_TP_GND)
FET_TP_GND_FETChannel4 "Socket" PIN1 1676.69,3638 r270 top (schematic designator FET_TP_GND)
FET_TP_GND_FETChannel5 "Socket" PIN1 2201.69,3638 r270 top (schematic designator FET_TP_GND)
FET_TP_GND_FETChannel6 "Socket" PIN1 2726.69,3638 r270 top (schematic designator FET_TP_GND)
JTAG/DEBUG1 "S9015E-05-ND" S9015E-05-ND 3330,1985 r270 top
kRESET "Header 2" HDR1X2 1680,1655 r0 top
L1 "Inductor" CIP0530LR3R3 5570,2335 r180 top
L2 "VLS252012T-2R2M1R3" VLS252012T-2R2M1R3 5021.58,2054.31 r180 top
"Logic Source1" "Header 3" HDR1X3 4768.58,2520.04 r0 top
M1_DriverChannelDRV88251 "Molex 0705430003" 4POL254 1705,175 r0 top (schematic designator M1)
M1_DriverChannelDRV88252 "Molex 0705430003" 4POL254 2630,175 r0 top (schematic designator M1)
M1_DriverChannelDRV88253 "Molex 0705430003" 4POL254 3555,175 r0 top (schematic designator M1)
M1_DriverChannelDRV88254 "Molex 0705430003" 4POL254 4480,175 r0 top (schematic designator M1)
M1_DriverChannelDRV88255 "Molex 0705430003" 4POL254 5405,175 r0 top (schematic designator M1)
MAX1_EndstopChannel1 "Molex 70543-03" 70543-03 670,1240 r270 top (schematic designator MAX1)
MAX1_EndstopChannel2 "Molex 70543-03" 70543-03 670,240 r270 top (schematic designator MAX1)
MAX1_EndstopChannel3 "Molex 70543-03" 70543-03 670,740 r270 top (schematic designator MAX1)
MIN1_EndstopChannel1 "Molex 70543-03" 70543-03 1010,1245 r90 top (schematic designator MIN1)
MIN1_EndstopChannel2 "Molex 70543-03" 70543-03 1010,245 r90 top (schematic designator MIN1)
MIN1_EndstopChannel3 "Molex 70543-03" 70543-03 1010,745 r90 top (schematic designator MIN1)
P2_ThermistorChannel1 "Molex 70543-02" 70543-02 3725,3805 r180 top (schematic designator P2)
P2_ThermistorChannel2 "Molex 70543-02" 70543-02 3725,3240 r180 top (schematic designator P2)
P3_DriverChannelDRV88251 "Header 5" HDR1X5 1917.5,1235 r180 top (schematic designator P3)
P3_DriverChannelDRV88252 "Header 5" HDR1X5 2842.5,1235 r180 top (schematic designator P3)
P3_DriverChannelDRV88253 "Header 5" HDR1X5 3767.5,1235 r180 top (schematic designator P3)
P3_DriverChannelDRV88254 "Header 5" HDR1X5 4692.5,1235 r180 top (schematic designator P3)
P3_DriverChannelDRV88255 "Header 5" HDR1X5 5617.5,1235 r180 top (schematic designator P3)
P4 "Header 2" HDR1X2 4182.6,1975.55 r180 top
"Power Input1" "con-phoenix-508" con-phoenix-508-6 5595,2610 r0 top
Q1_FETChannel1 "FDT439N" "Fairchild FDT439N" 246.69,3398 r90 top (schematic designator Q1)
Q1_FETChannel2 "FDT439N" "Fairchild FDT439N" 771.69,3398 r90 top (schematic designator Q1)
Q1_FETChannel3 "FDT439N" "Fairchild FDT439N" 1296.69,3398 r90 top (schematic designator Q1)
Q1_FETChannel4 "FDT439N" "Fairchild FDT439N" 1821.69,3398 r90 top (schematic designator Q1)
Q1_FETChannel5 "FDT439N" "Fairchild FDT439N" 2346.69,3398 r90 top (schematic designator Q1)
Q1_FETChannel6 "FDT439N" "Fairchild FDT439N" 2871.69,3398 r90 top (schematic designator Q1)
R1 "Res3" J1-0603 3960,3870 r180 top
R2_EndstopChannel1 "0603" J1-0603 865,1065.47 r90 top (schematic designator R2)
R2_EndstopChannel2 "0603" J1-0603 865,105.47 r90 top (schematic designator R2)
R2_EndstopChannel3 "0603" J1-0603 865,565.47 r90 top (schematic designator R2)
R3_EndstopChannel1 "0603" J1-0603 865,1320.47 r270 top (schematic designator R3)
R3_EndstopChannel2 "0603" J1-0603 865,320.47 r270 top (schematic designator R3)
R3_EndstopChannel3 "0603" J1-0603 865,820.47 r270 top (schematic designator R3)
R4_FETChannel1 "0805" "SM 0805 - gap trimmed" 446.69,3623 r0 top (schematic designator R4)
R4_FETChannel2 "0805" "SM 0805 - gap trimmed" 971.69,3623 r0 top (schematic designator R4)
R4_FETChannel3 "0805" "SM 0805 - gap trimmed" 1496.69,3623 r0 top (schematic designator R4)
R4_FETChannel4 "0805" "SM 0805 - gap trimmed" 2021.69,3623 r0 top (schematic designator R4)
R4_FETChannel5 "0805" "SM 0805 - gap trimmed" 2546.69,3623 r0 top (schematic designator R4)
R4_FETChannel6 "0805" "SM 0805 - gap trimmed" 3071.69,3623 r0 top (schematic designator R4)
R5_FETChannel1 "0603" J1-0603 151.69,3198 r0 top (schematic designator R5)
R5_FETChannel2 "0603" J1-0603 676.69,3198 r0 top (schematic designator R5)
R5_FETChannel3 "0603" J1-0603 1201.69,3198 r0 top (schematic designator R5)
R5_FETChannel4 "0603" J1-0603 1726.69,3198 r0 top (schematic designator R5)
R5_FETChannel5 "0603" J1-0603 2251.69,3198 r0 top (schematic designator R5)
R5_FETChannel6 "0603" J1-0603 2776.69,3198 r0 top (schematic designator R5)
R6_FETChannel1 "0603" J1-0603 151.69,3148 r0 top (schematic designator R6)
R6_FETChannel2 "0603" J1-0603 676.69,3148 r0 top (schematic designator R6)
R6_FETChannel3 "0603" J1-0603 1201.69,3148 r0 top (schematic designator R6)
R6_FETChannel4 "0603" J1-0603 1726.69,3148 r0 top (schematic designator R6)
R6_FETChannel5 "0603" J1-0603 2251.69,3148 r0 top (schematic designator R6)
R6_FETChannel6 "0603" J1-0603 2776.69,3148 r0 top (schematic designator R6)
R7 "Res3" J1-0603 5895,2175 r90 top
R8 "Res3" "SM 0805 - gap trimmed" 5370,2155 r270 top
R9 "Res3" J1-0603 5865,2320 r180 top
R10 "Res3" J1-0603 5895,2065 r90 top
R11 "Res3" "SM 0805 - gap trimmed" 5144.58,1918.31 r90 top
R12 "0603" J1-0603 5132.58,2082.31 r270 top
R13_ThermistorChannel1 "Res3" J1-0603 3810,3635 r90 top (schematic designator R13)
R13_ThermistorChannel2 "Res3" J1-0603 3810,3060 r90 top (schematic designator R13)
R14_ThermistorChannel1 "Res3" J1-0603 3810,3535 r90 top (schematic designator R14)
R14_ThermistorChannel2 "Res3" J1-0603 3810,2960 r90 top (schematic designator R14)
R15 "0603" J1-0603 815,2955 r90 top
R16 "0603" J1-0603 865,2955 r90 top
R17 "0603" J1-0603 2130,2655 r90 top
R18 "0603" J1-0603 805,2770 r180 top
R19 "0603" J1-0603 2080,2655 r90 top
R20 "0603" J1-0603 805,2825 r180 top
R21 "Res3" J1-0603 3180,2315 r180 top
R22 "0603" J1-0603 4365,1715 r0 top
R23 "Res3" J1-0603 3940.47,1709.53 r0 top
R24 "0603" J1-0603 3175,1750 r270 top
R25 "0603" J1-0603 3170,1840 r180 top
R26 "0603" J1-0603 3005,2085 r90 top
R27 "0603" J1-0603 3195,1970 r90 top
R28 "0603" J1-0603 4040.47,1709.53 r180 top
R29 "0603" J1-0603 4465,1715 r0 top
R30_DriverChannelDRV88251 "0603" J1-0603 1375,725 r90 top (schematic designator R30)
R30_DriverChannelDRV88252 "0603" J1-0603 2300,725 r90 top (schematic designator R30)
R30_DriverChannelDRV88253 "0603" J1-0603 3225,725 r90 top (schematic designator R30)
R30_DriverChannelDRV88254 "0603" J1-0603 4150,725 r90 top (schematic designator R30)
R30_DriverChannelDRV88255 "0603" J1-0603 5075,725 r90 top (schematic designator R30)
R31_DriverChannelDRV88251 "0603" J1-0603 1950,800 r0 top (schematic designator R31)
R31_DriverChannelDRV88252 "0603" J1-0603 2875,800 r0 top (schematic designator R31)
R31_DriverChannelDRV88253 "0603" J1-0603 3800,800 r0 top (schematic designator R31)
R31_DriverChannelDRV88254 "0603" J1-0603 4725,800 r0 top (schematic designator R31)
R31_DriverChannelDRV88255 "0603" J1-0603 5650,800 r0 top (schematic designator R31)
R32_DriverChannelDRV88251 "2512" Resistor2512 1780,540 r90 top (schematic designator R32)
R32_DriverChannelDRV88252 "2512" Resistor2512 2705,540 r90 top (schematic designator R32)
R32_DriverChannelDRV88253 "2512" Resistor2512 3630,540 r90 top (schematic designator R32)
R32_DriverChannelDRV88254 "2512" Resistor2512 4555,540 r90 top (schematic designator R32)
R32_DriverChannelDRV88255 "2512" Resistor2512 5480,540 r90 top (schematic designator R32)
R33_DriverChannelDRV88251 "2512" Resistor2512 1630,540 r90 top (schematic designator R33)
R33_DriverChannelDRV88252 "2512" Resistor2512 2555,540 r90 top (schematic designator R33)
R33_DriverChannelDRV88253 "2512" Resistor2512 3480,540 r90 top (schematic designator R33)
R33_DriverChannelDRV88254 "2512" Resistor2512 4405,540 r90 top (schematic designator R33)
R33_DriverChannelDRV88255 "2512" Resistor2512 5330,540 r90 top (schematic designator R33)
R34 "0603" J1-0603 4167.6,2125.55 r180 top
R35 "0603" J1-0603 4067.6,2125.55 r0 top
R36 "0603" J1-0603 4557.6,1975.55 r0 top
R37 "0603" J1-0603 5211.58,2134.31 r270 top
R38 "0603" J1-0603 5211.58,2234.31 r270 top
RESET1 "Tactile Switch" TL3301 3365,2400 r0 top
SPD1 "Header 3" HDR1X3 1250,3015 r0 top
T2_ThermocoupleChannel1 "Molex 70543-02" 70543-02 3350,3820 r180 top (schematic designator T2)
T2_ThermocoupleChannel2 "Molex 70543-02" 70543-02 3350,3245 r180 top (schematic designator T2)
THM_TP1_ThermistorChannel1 "TP4" PIN1 3590,3515 r180 top (schematic designator THM_TP1)
THM_TP1_ThermistorChannel2 "TP4" PIN1 3590,2940 r180 top (schematic designator THM_TP1)
TRST1 "Header 2" HDR1X2 4045.47,1794.53 r180 top
U1 "MIC24085" MIC24085-AYML 5770,2100 r90 top
U2 "TPS62142RGTT" RGT16-1700X1700TP 5076.58,2214.31 r90 top
U4_ThermocoupleChannel1 "MAX31855EASA+" MAXM-S8+4_N 3345,3545 r180 top (schematic designator U4)
U4_ThermocoupleChannel2 "MAX31855EASA+" MAXM-S8+4_N 3345,2970 r180 top (schematic designator U4)
U5 "ATSAM4E16EA-AU" LQFP144_N 2350,2065 r0 top
U6 "ADuM4160" ADuM4160 1150,2705 r90 top
U7_DriverChannelDRV88251 "DRV8825" DRV8825 1705,955 r90 top (schematic designator U7)
U7_DriverChannelDRV88252 "DRV8825" DRV8825 2630,955 r90 top (schematic designator U7)
U7_DriverChannelDRV88253 "DRV8825" DRV8825 3555,955 r90 top (schematic designator U7)
U7_DriverChannelDRV88254 "DRV8825" DRV8825 4480,955 r90 top (schematic designator U7)
U7_DriverChannelDRV88255 "DRV8825" DRV8825 5405,955 r90 top (schematic designator U7)
U8 "MKL05Z32VLF4" MKL05Z32VLF4 4337.6,2740.47 r90 top
USB "USB-B" PN61729 410,2685 r270 top
X1 "ABS07-32.768KHZ-T" ABS07-32.768KHZ-T 4592.6,2507.32 r270 top
X2 "445C35A12M00000" 445C35A12M00000 1940,2635 r180 top

## Footprints (in the part's own frame and the unit in brackets; to place one, negate y for a bottom-side part, rotate by r counter-clockwise, add the part's x,y. Pads: shape width x height; smd on the part's side, far side on the other; paste and mask are expansions set on the pad)
1N4148WT [mm] "Molded Diode, 2-Leads, Body 1.20x0.80mm, IPC Medium Density"
  rect 1x0.3 smd: 1(-0.675,0) 2(0.675,0)
  silkscreen extent -0.7,-0.5 1.15,0.55, body extent -0.65,-0.45 0.65,0.45, height 0.7
4POL254 [mil]
  oval 60x120 hole 40: 1(-150,0) 2(-50,0) 3(50,0) 4(150,0)
  silkscreen extent -250,-150 250,113, body extent -250,-150 250,113, height 454
445C35A12M00000 [mm] "Crystal Oscillator"
  rect 1.8x2.4 smd: 1(0,0) 2(3.8,0)
  silkscreen extent -1.65,-1.91 5.46,1.91, body extent -1.27,-1.52 5.08,1.52, height 1
1608[0603] [mm] "Chip Capacitor, Body 1.6x0.8mm, IPC High Density"
  rect 0.8x0.9 smd: 1(-0.7,0) 2(0.7,0)
  body extent -0.87,-0.48 0.87,0.48, height 1.3
3522-2 [mil] "3522-2"
  oct 140x140 hole 100: 1(-280,0) 1(-80,0) 2(80,0) 2(280,0)
  silkscreen extent -400,-100 400,100, body extent -402,-103 402,103, height 299
70543-02 [mil]
  oval 60x120 hole 40: 1(-50,0) 2(50,0)
  silkscreen extent -150,-150 150,113, body extent -150,-150 150,113, height 450
70543-03 [mil]
  oval 60x120 hole 40: 1(-100,0) 2(0,0) 3(100,0)
  silkscreen extent -200,-150 200,113, body extent -200,-150 200,113, height 450
ABS07-32.768KHZ-T [mm] "ABS07-32.768KHZ-T Crystal Oscillator"
  rect 1.1x1.9 smd: 1(0,0) 2(1.95,0)
  silkscreen extent -1.1,-1.5 3,1.5
ADuM4160 [mm] "SOIC, 16-Leads, Body 10.30x7.50mm, Pitch 1.27mm, IPC Medium Density"
  oval 2.3x0.6 smd: 1(-4.575,4.445) 2(-4.575,3.175) 3(-4.575,1.905) 4(-4.575,0.635) 5(-4.575,-0.635) 6(-4.575,-1.905) 7(-4.575,-3.175) 8(-4.575,-4.445) 9(4.575,-4.445) 10(4.575,-3.175) 11(4.575,-1.905) 12(4.575,-0.635) 13(4.575,0.635) 14(4.575,1.905) 15(4.575,3.175) 16(4.575,4.445)
  silkscreen extent -4.7,-5.25 3.03,5.42, body extent -3.8,-5.25 3.8,5.25, height 2.65
BLM18PG121SN1D [mm] "Chip Inductor, 2-Leads, Body 1.0x0.5mm, IPC Medium Density"
  rect 0.8x0.6 smd: 1(-0.6,0) 2(0.6,0)
  body extent -0.52,-0.28 0.53,0.27, height 0.6
C1206 [mm] "Chip Capacitor, Body 3.2x1.6mm, IPC High Density"
  rect 1.1x1.7 smd: 1(-1.35,0) 2(1.35,0)
  silkscreen extent -0.4,-0.75 0.4,0.75, body extent -1.7,-0.9 1.7,0.9, height 1.3
C1210 [mm] "Chip Capacitor, Body 3.2x2.5mm, IPC High Density"
  rect 1.1x2.6 smd: 1(-1.35,0) 2(1.35,0)
  silkscreen extent -0.4,-1.2 0.4,1.2, body extent -1.7,-1.35 1.7,1.35, height 1.3
CIP0530LR3R3 [mm] "Precision Wire Wound Inductor, 2-Leads, Body 5.58x5.30mm, IPC Medium Density"
  rect 2.55x2.7 smd: 1(-2.175,0) 2(2.175,0)
  silkscreen extent -2.9,-2.7 2.9,2.7, body extent -2.88,-2.7 2.88,2.7, height 2.29
con-phoenix-508-6 [mm] "con-phoenix-508"
  oval 3x2 hole 1.4: 1(0,25.4) 2(0,20.32) 3(0,15.24) 4(0,10.16) 5(0,5.08) 6(0,0)
  silkscreen extent -2,-3.54 10,28.94
DRV8825 [mm] "TSOP, 28-Leads, Body 9.70x4.40mm, Pitch 0.65mm, Thermal Pad 5.22.2x3.10.2mm, IPC Medium Density"
  oval 1.7x0.35 smd: 1(-2.85,4.225) 2(-2.85,3.575) 3(-2.85,2.925) 4(-2.85,2.275) 5(-2.85,1.625) 6(-2.85,0.975) 7(-2.85,0.325) 8(-2.85,-0.325) 9(-2.85,-0.975) 10(-2.85,-1.625) 11(-2.85,-2.275) 12(-2.85,-2.925) 13(-2.85,-3.575) 14(-2.85,-4.225) 15(2.85,-4.225) 16(2.85,-3.575) 17(2.85,-2.925) 18(2.85,-2.275) 19(2.85,-1.625) 20(2.85,-0.975) 21(2.85,-0.325) 22(2.85,0.325) 23(2.85,0.975) 24(2.85,1.625) 25(2.85,2.275) 26(2.85,2.925) 27(2.85,3.575) 28(2.85,4.225)
  rect 3.1x5.22 smd: 29(0,0)
  silkscreen extent -2.97,-4.9 1.6,5.07, body extent -2.25,-4.9 2.25,4.9, height 1.2
F1210_M [mm] "Bournes PTC Fuse"
  rect 1x2.5 smd: 1(-1.5,0) 2(1.5,0)
  silkscreen extent -0.4,-1.3 0.4,1.3, body extent -1.7,-1.35 1.7,1.4, height 0.85
"Fairchild FDT439N" [mm] "SOT223, 4-Leads, Body 6.60x7.08mm (avg), Pitch 2.30mm, IPC Medium Density"
  rect 2.2x1 smd: 1(-2.95,2.3) 2(-2.95,0) 3(-2.95,-2.3)
  rect 2.2x3.25 smd: 2(2.95,0)
  silkscreen extent -3.07,-3.35 1.55,3.47, body extent -1.85,-3.35 1.85,3.35, height 1.6
FTSH-105-XX-X-DV [mm] "1.27mm pitch, 10 pin, terminal strip; vertical, SMT"
  rect 0.75x2.8 smd mask+0: 1(2.54,2.03) 2(2.54,-2.03) 3(1.27,2.03) 4(1.27,-2.03) 5(0,2.03) 6(0,-2.03) 7(-1.27,2.03) 8(-1.27,-2.03) 9(-2.54,2.03) 10(-2.54,-2.03)
  silkscreen extent 3.28,3.03 3.52,3.27
HDR1X2 [mm] "Connector; Header; 2 Position"
  rect 1.5x1.5 hole 0.9: 1(0,0)
  round 1.5 hole 0.9: 2(2.54,0)
  silkscreen extent -1.27,-1.27 3.81,1.27
HDR1X3 [mm] "Connector; Header; 3 Position"
  rect 1.5x1.5 hole 0.9: 1(0,0)
  round 1.5 hole 0.9: 2(2.54,0) 3(5.08,0)
  silkscreen extent -1.27,-1.27 6.35,1.27
HDR1X5 [mm] "Connector; Header; 5 Position"
  rect 1.5x1.5 hole 0.9: 1(0,0)
  round 1.5 hole 0.9: 2(2.54,0) 3(5.08,0) 4(7.62,0) 5(10.16,0)
  silkscreen extent -1.27,-1.27 11.43,1.27
HDR2X20 [mm] "Connector; Header; 20x2 Position"
  rect 1.5x1.5 hole 0.9: 1(0,0)
  round 1.5 hole 0.9: 2(0,2.54) 3(2.54,0) 4(2.54,2.54) 5(5.08,0) 6(5.08,2.54) 7(7.62,0) 8(7.62,2.54) 9(10.16,0) 10(10.16,2.54) 11(12.7,0) 12(12.7,2.54) 13(15.24,0) 14(15.24,2.54) 15(17.78,0) 16(17.78,2.54) 17(20.32,0) 18(20.32,2.54) 19(22.86,0) 20(22.86,2.54) 21(25.4,0) 22(25.4,2.54) 23(27.94,0) 24(27.94,2.54) 25(30.48,0) 26(30.48,2.54) 27(33.02,0) 28(33.02,2.54) 29(35.56,0) 30(35.56,2.54) 31(38.1,0) 32(38.1,2.54) 33(40.64,0) 34(40.64,2.54) 35(43.18,0) 36(43.18,2.54) 37(45.72,0) 38(45.72,2.54) 39(48.26,0) 40(48.26,2.54)
  silkscreen extent -1.27,-1.27 49.53,3.81
J1-0603 [mm] "Chip Resistor, Body 1.6x0.8mm, IPC High Density"
  rect 0.7x0.9 smd: 1(-0.75,0) 2(0.75,0)
  silkscreen extent -0.2,-0.35 0.2,0.35, body extent -0.85,-0.48 0.85,0.48, height 0.9
LQFP144_N [mm] "Thin QFP, 144-Leads, Body 20x20mm, Pitch 0.5mm, IPC Medium Density"
  oval 1.8x0.3 smd: 1(-10.55,8.75) 2(-10.55,8.25) 3(-10.55,7.75) 4(-10.55,7.25) 5(-10.55,6.75) 6(-10.55,6.25) 7(-10.55,5.75) 8(-10.55,5.25) 9(-10.55,4.75) 10(-10.55,4.25) 11(-10.55,3.75) 12(-10.55,3.25) 13(-10.55,2.75) 14(-10.55,2.25) 15(-10.55,1.75) 16(-10.55,1.25) 17(-10.55,0.75) 18(-10.55,0.25) 19(-10.55,-0.25) 20(-10.55,-0.75) 21(-10.55,-1.25) 22(-10.55,-1.75) 23(-10.55,-2.25) 24(-10.55,-2.75) 25(-10.55,-3.25) 26(-10.55,-3.75) 27(-10.55,-4.25) 28(-10.55,-4.75) 29(-10.55,-5.25) 30(-10.55,-5.75) 31(-10.55,-6.25) 32(-10.55,-6.75) 33(-10.55,-7.25) 34(-10.55,-7.75) 35(-10.55,-8.25) 36(-10.55,-8.75) 73(10.55,-8.75) 74(10.55,-8.25) 75(10.55,-7.75) 76(10.55,-7.25) 77(10.55,-6.75) 78(10.55,-6.25) 79(10.55,-5.75) 80(10.55,-5.25) 81(10.55,-4.75) 82(10.55,-4.25) 83(10.55,-3.75) 84(10.55,-3.25) 85(10.55,-2.75) 86(10.55,-2.25) 87(10.55,-1.75) 88(10.55,-1.25) 89(10.55,-0.75) 90(10.55,-0.25) 91(10.55,0.25) 92(10.55,0.75) 93(10.55,1.25) 94(10.55,1.75) 95(10.55,2.25) 96(10.55,2.75) 97(10.55,3.25) 98(10.55,3.75) 99(10.55,4.25) 100(10.55,4.75) 101(10.55,5.25) 102(10.55,5.75) 103(10.55,6.25) 104(10.55,6.75) 105(10.55,7.25) 106(10.55,7.75) 107(10.55,8.25) 108(10.55,8.75)
  oval 0.3x1.8 smd: 37(-8.75,-10.55) 38(-8.25,-10.55) 39(-7.75,-10.55) 40(-7.25,-10.55) 41(-6.75,-10.55) 42(-6.25,-10.55) 43(-5.75,-10.55) 44(-5.25,-10.55) 45(-4.75,-10.55) 46(-4.25,-10.55) 47(-3.75,-10.55) 48(-3.25,-10.55) 49(-2.75,-10.55) 50(-2.25,-10.55) 51(-1.75,-10.55) 52(-1.25,-10.55) 53(-0.75,-10.55) 54(-0.25,-10.55) 55(0.25,-10.55) 56(0.75,-10.55) 57(1.25,-10.55) 58(1.75,-10.55) 59(2.25,-10.55) 60(2.75,-10.55) 61(3.25,-10.55) 62(3.75,-10.55) 63(4.25,-10.55) 64(4.75,-10.55) 65(5.25,-10.55) 66(5.75,-10.55) 67(6.25,-10.55) 68(6.75,-10.55) 69(7.25,-10.55) 70(7.75,-10.55) 71(8.25,-10.55) 72(8.75,-10.55) 109(8.75,10.55) 110(8.25,10.55) 111(7.75,10.55) 112(7.25,10.55) 113(6.75,10.55) 114(6.25,10.55) 115(5.75,10.55) 116(5.25,10.55) 117(4.75,10.55) 118(4.25,10.55) 119(3.75,10.55) 120(3.25,10.55) 121(2.75,10.55) 122(2.25,10.55) 123(1.75,10.55) 124(1.25,10.55) 125(0.75,10.55) 126(0.25,10.55) 127(-0.25,10.55) 128(-0.75,10.55) 129(-1.25,10.55) 130(-1.75,10.55) 131(-2.25,10.55) 132(-2.75,10.55) 133(-3.25,10.55) 134(-3.75,10.55) 135(-4.25,10.55) 136(-4.75,10.55) 137(-5.25,10.55) 138(-5.75,10.55) 139(-6.25,10.55) 140(-6.75,10.55) 141(-7.25,10.55) 142(-7.75,10.55) 143(-8.25,10.55) 144(-8.75,10.55)
  silkscreen extent -10.67,-9.25 9.25,9.57, body extent -10,-10 10,10, height 1.6
MAXM-S8+4_N [mm] "SOIC, 8-Leads, Body 4.9x3.9mm, Pitch 1.27mm, IPC Medium Density"
  oval 2.2x0.6 smd: 1(-2.4,1.905) 2(-2.4,0.635) 3(-2.4,-0.635) 4(-2.4,-1.905) 5(2.4,-1.905) 6(2.4,-0.635) 7(2.4,0.635) 8(2.4,1.905)
  silkscreen extent -2.53,-2.5 0.9,2.88, body extent -2,-2.5 2,2.5, height 1.75
MIC24085-AYML [mm] "QFN, 16-Leads, Body 3.25x3.25mm, Pitch 0.50mm, Thermal Pad 1.73x1.73mm, IPC Medium Density"
  oval 0.8x0.25 smd: 1(-1.7,0.75) 2(-1.7,0.25) 3(-1.7,-0.25) 4(-1.7,-0.75) 9(1.7,-0.75) 10(1.7,-0.25) 11(1.7,0.25) 12(1.7,0.75)
  oval 0.25x0.8 smd: 5(-0.75,-1.7) 6(-0.25,-1.7) 7(0.25,-1.7) 8(0.75,-1.7) 13(0.75,1.7) 14(0.25,1.7) 15(-0.25,1.7) 16(-0.75,1.7)
  rect 1.73x1.73 smd: 17(0,0)
  silkscreen extent -2.67,-1.9 1.9,1.9, body extent -1.75,-1.75 1.75,1.75, height 0.85
MKL05Z32VLF4 [mm] "TSQFP, 48-Leads, Body 7.00x7.00mm, Pitch 0.50mm, IPC Medium Density"
  oval 1.6x0.3 smd: 1(-4.125,2.75) 2(-4.125,2.25) 3(-4.125,1.75) 4(-4.125,1.25) 5(-4.125,0.75) 6(-4.125,0.25) 7(-4.125,-0.25) 8(-4.125,-0.75) 9(-4.125,-1.25) 10(-4.125,-1.75) 11(-4.125,-2.25) 12(-4.125,-2.75) 25(4.125,-2.75) 26(4.125,-2.25) 27(4.125,-1.75) 28(4.125,-1.25) 29(4.125,-0.75) 30(4.125,-0.25) 31(4.125,0.25) 32(4.125,0.75) 33(4.125,1.25) 34(4.125,1.75) 35(4.125,2.25) 36(4.125,2.75)
  oval 0.3x1.6 smd: 13(-2.75,-4.125) 14(-2.25,-4.125) 15(-1.75,-4.125) 16(-1.25,-4.125) 17(-0.75,-4.125) 18(-0.25,-4.125) 19(0.25,-4.125) 20(0.75,-4.125) 21(1.25,-4.125) 22(1.75,-4.125) 23(2.25,-4.125) 24(2.75,-4.125) 37(2.75,4.125) 38(2.25,4.125) 39(1.75,4.125) 40(1.25,4.125) 41(0.75,4.125) 42(0.25,4.125) 43(-0.25,4.125) 44(-0.75,4.125) 45(-1.25,4.125) 46(-1.75,4.125) 47(-2.25,4.125) 48(-2.75,4.125)
  silkscreen extent -4.25,-2.93 2.93,3.6, body extent -3.5,-3.5 3.5,3.5, height 1.6
"Molex 70543-02" [mm]
  rect 2x2 hole 1.09: 1(0,0)
  round 2 hole 1.09: 2(2.54,0)
  silkscreen extent -2.54,-4.06 5.08,2.54
"Mountain Switch TS6324T1607" [mm]
  rect 1.3x1.55 smd: 1(0,0.7) 1(0,-7.2) 2(4.5,0.7) 2(4.5,-7.2)
  silkscreen extent 0,-5.5 4.5,-1
"Panasonic VS C" [mm]
  rect 3x1.4 smd: 1(5.348,2.921) 2(0.748,2.921)
  silkscreen extent 0.05,0.22 6.05,5.62, body extent 0.1,0.29 6,5.59, height 5.41
"Panasonic VS D" [mm]
  rect 3.4x1.4 smd: 1(2.6,0) 2(-2.6,0)
  silkscreen extent -3,-3.2 3,3.2, body extent -3.5,-3.3 3.5,3.3, height 5.4
PIN1 [mm] "Connector; Plug"
  rect 1.5x1.5 hole 0.9: 1(0,0)
  silkscreen extent -1.4,-1.4 1.4,2.17
PMEG1030EH_EJ [mm] "Molded Diode, 2-Leads, Body 2.60x1.60mm, IPC Medium Density"
  rect 1.3x0.65 smd: 1(-1.225,0) 2(1.225,0)
  silkscreen extent -1.4,-0.85 1.85,0.85, body extent -1.35,-0.85 1.35,0.85, height 1.2
PN61729 [mil]
  oct 66x66 hole 38: 1(50,186) 2(-49.21,186) 3(-49.21,107) 4(50,107)
  round 130.5 hole 87: 5(-236.22,0) 6(237,0)
  silkscreen extent -232,-400 233,221, body extent -237,-405 238,226, height 406
Resistor2512 [mm]
  rect 1.6x3.1 smd: 1(-3.25,0) 2(3.25,0)
  silkscreen extent -2.26,-1.3 2.26,1.3, body extent -3.24,-1.4 3.24,1.4, height 0.9
RGT16-1700X1700TP [mm] "QFN, 16-Leads, Body 3x3mm, Pitch 0.5mm, Thermal Pad 1.7x1.7mm, TI Recommended"
  oval 0.85x0.28 smd paste-0.025 mask+0.07: 1(-1.475,0.75) 2(-1.475,0.25) 3(-1.475,-0.25) 4(-1.475,-0.75) 9(1.475,-0.75) 10(1.475,-0.25) 11(1.475,0.25) 12(1.475,0.75)
  oval 0.28x0.85 smd paste-0.025 mask+0.07: 5(-0.75,-1.475) 6(-0.25,-1.475) 7(0.25,-1.475) 8(0.75,-1.475) 13(0.75,1.475) 14(0.25,1.475) 15(-0.25,1.475) 16(-0.75,1.475)
  rect 1.7x1.7 smd paste-0.85 mask+0.07: 17(0,0)
  silkscreen extent -2.5,-1.73 1.73,1.73, body extent -1.57,-1.57 1.58,1.58, height 1
S9015E-05-ND [mm] "10 Pin Cortex JTAG Debug Header"
  round 1.1 hole 0.508: 1(5.08,0) 2(5.08,-1.27) 3(3.81,0) 4(3.81,-1.27) 5(2.54,0) 6(2.54,-1.27) 7(1.27,0) 8(1.27,-1.27) 9(0,0) 10(0,-1.27)
  round 0.5 on Top Overlay: 1(7,0.8)
  silkscreen extent -1.25,-2.5 6.5,1.25
SK310A-TP [mm] "Molded Diode, 2-Leads, Body 4.31x2.69mm, IPC Medium Density"
  rect 2.3x2.15 smd: 1(-1.625,0) 2(1.625,0)
  silkscreen extent -2.3,-1.45 3.07,1.75, body extent -2.29,-1.42 2.28,1.42, height 2.95
"SM 0805 - gap trimmed" [mm]
  rect 1x1.5 smd: 1(-1.1,0) 2(1.1,0)
  silkscreen extent -0.36,-0.64 0.35,0.63
"SM 0805 polarized" [mm]
  rect 1x1.5 smd: 1(0.93,-1.105) 2(3.13,-1.105)
  silkscreen extent 0.1,-1.9 2.38,-0.3
SMB [mm] "DO-214-AA/SMB; 2 C-Bend Leads; Body 5.3 x 3.6 mm, inc. leads (LxW)"
  rect 2.3x2.3 smd: 1(-2.25,0) 2(2.25,0)
  silkscreen extent -3.8,-1.55 4.1,1.55
SZMM3Z4V7T1G [mm] "Molded Diode, 2-Leads, Body 1.70x1.25mm, IPC Medium Density"
  rect 0.9x0.35 smd: 1(-1,0) 2(1,0)
  silkscreen extent -0.95,-0.7 1.4,0.7, body extent -0.9,-0.67 0.9,0.67, height 1
TL3301 [mm]
  rect 1.4x2.1 smd: 1(-2.3,-4.5) 1(-2.3,4.5) 2(2.3,-4.5) 2(2.3,4.5)
  silkscreen extent -2.2,-2.4 2.2,2.4
VLS252012T-2R2M1R3 [mm] "Precision Wire Wound Inductor, 2-Leads, Body 2.5x2.0mm, IPC Medium Density"
  rect 1.65x2.1 smd: 1(-1.025,0) 2(1.025,0)
  body extent -1.3,-1.05 1.3,1.05, height 1.2